# Allegro board wi-fi_2.brd
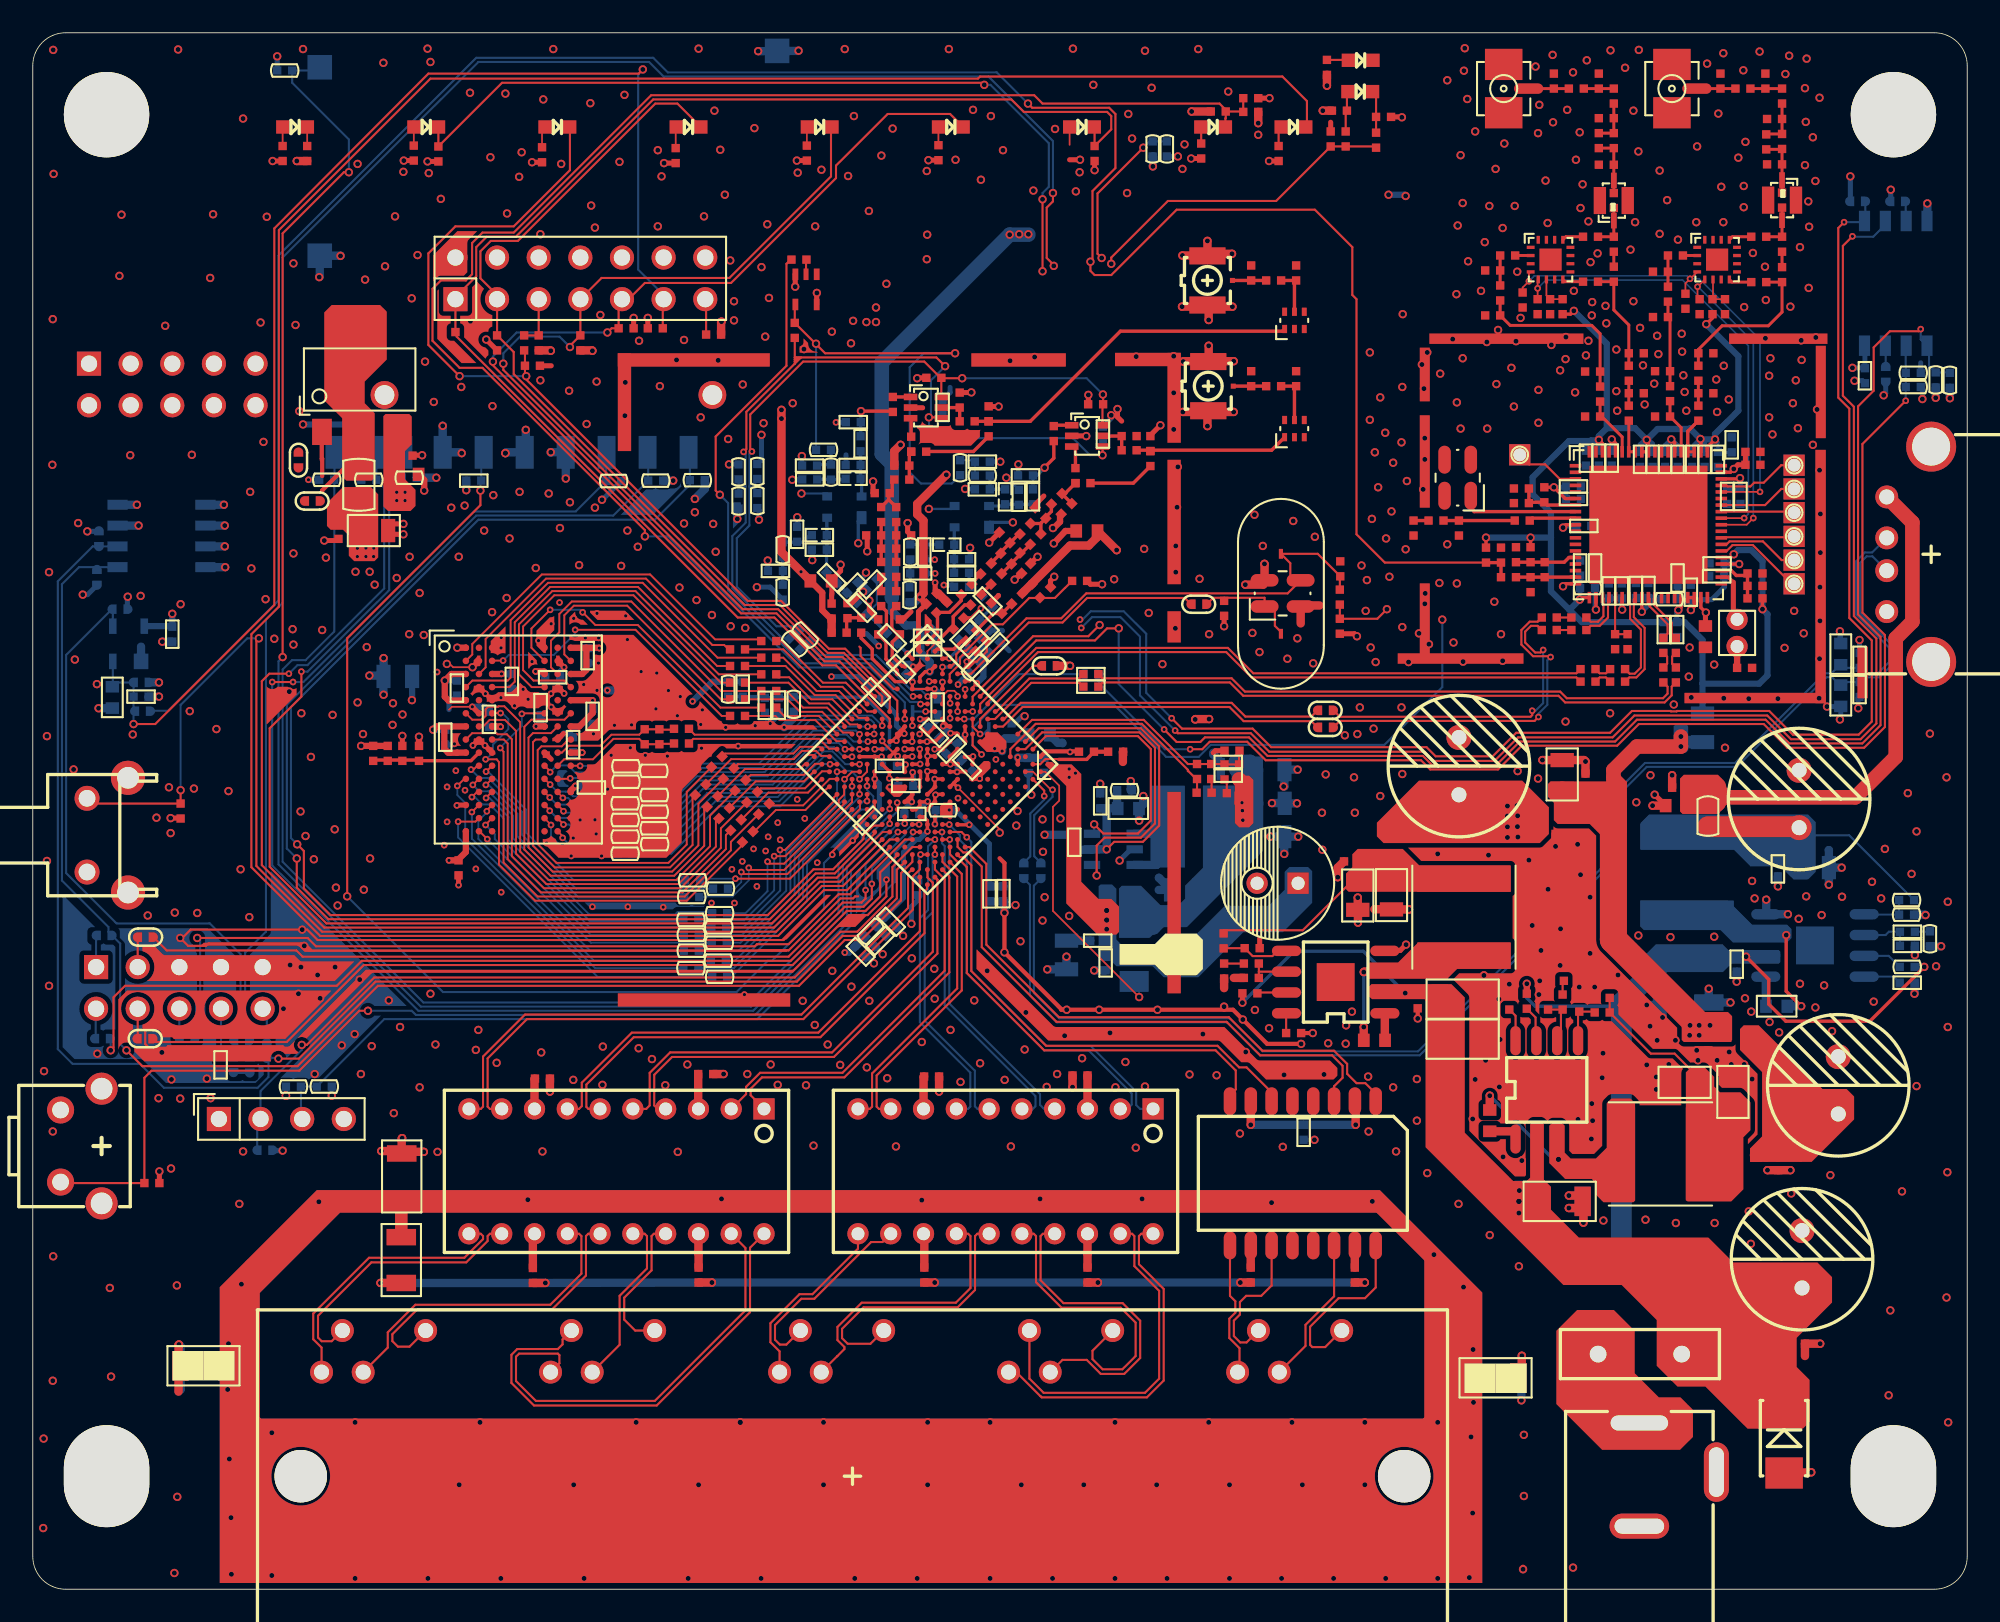
[diagram p0: board, top side]
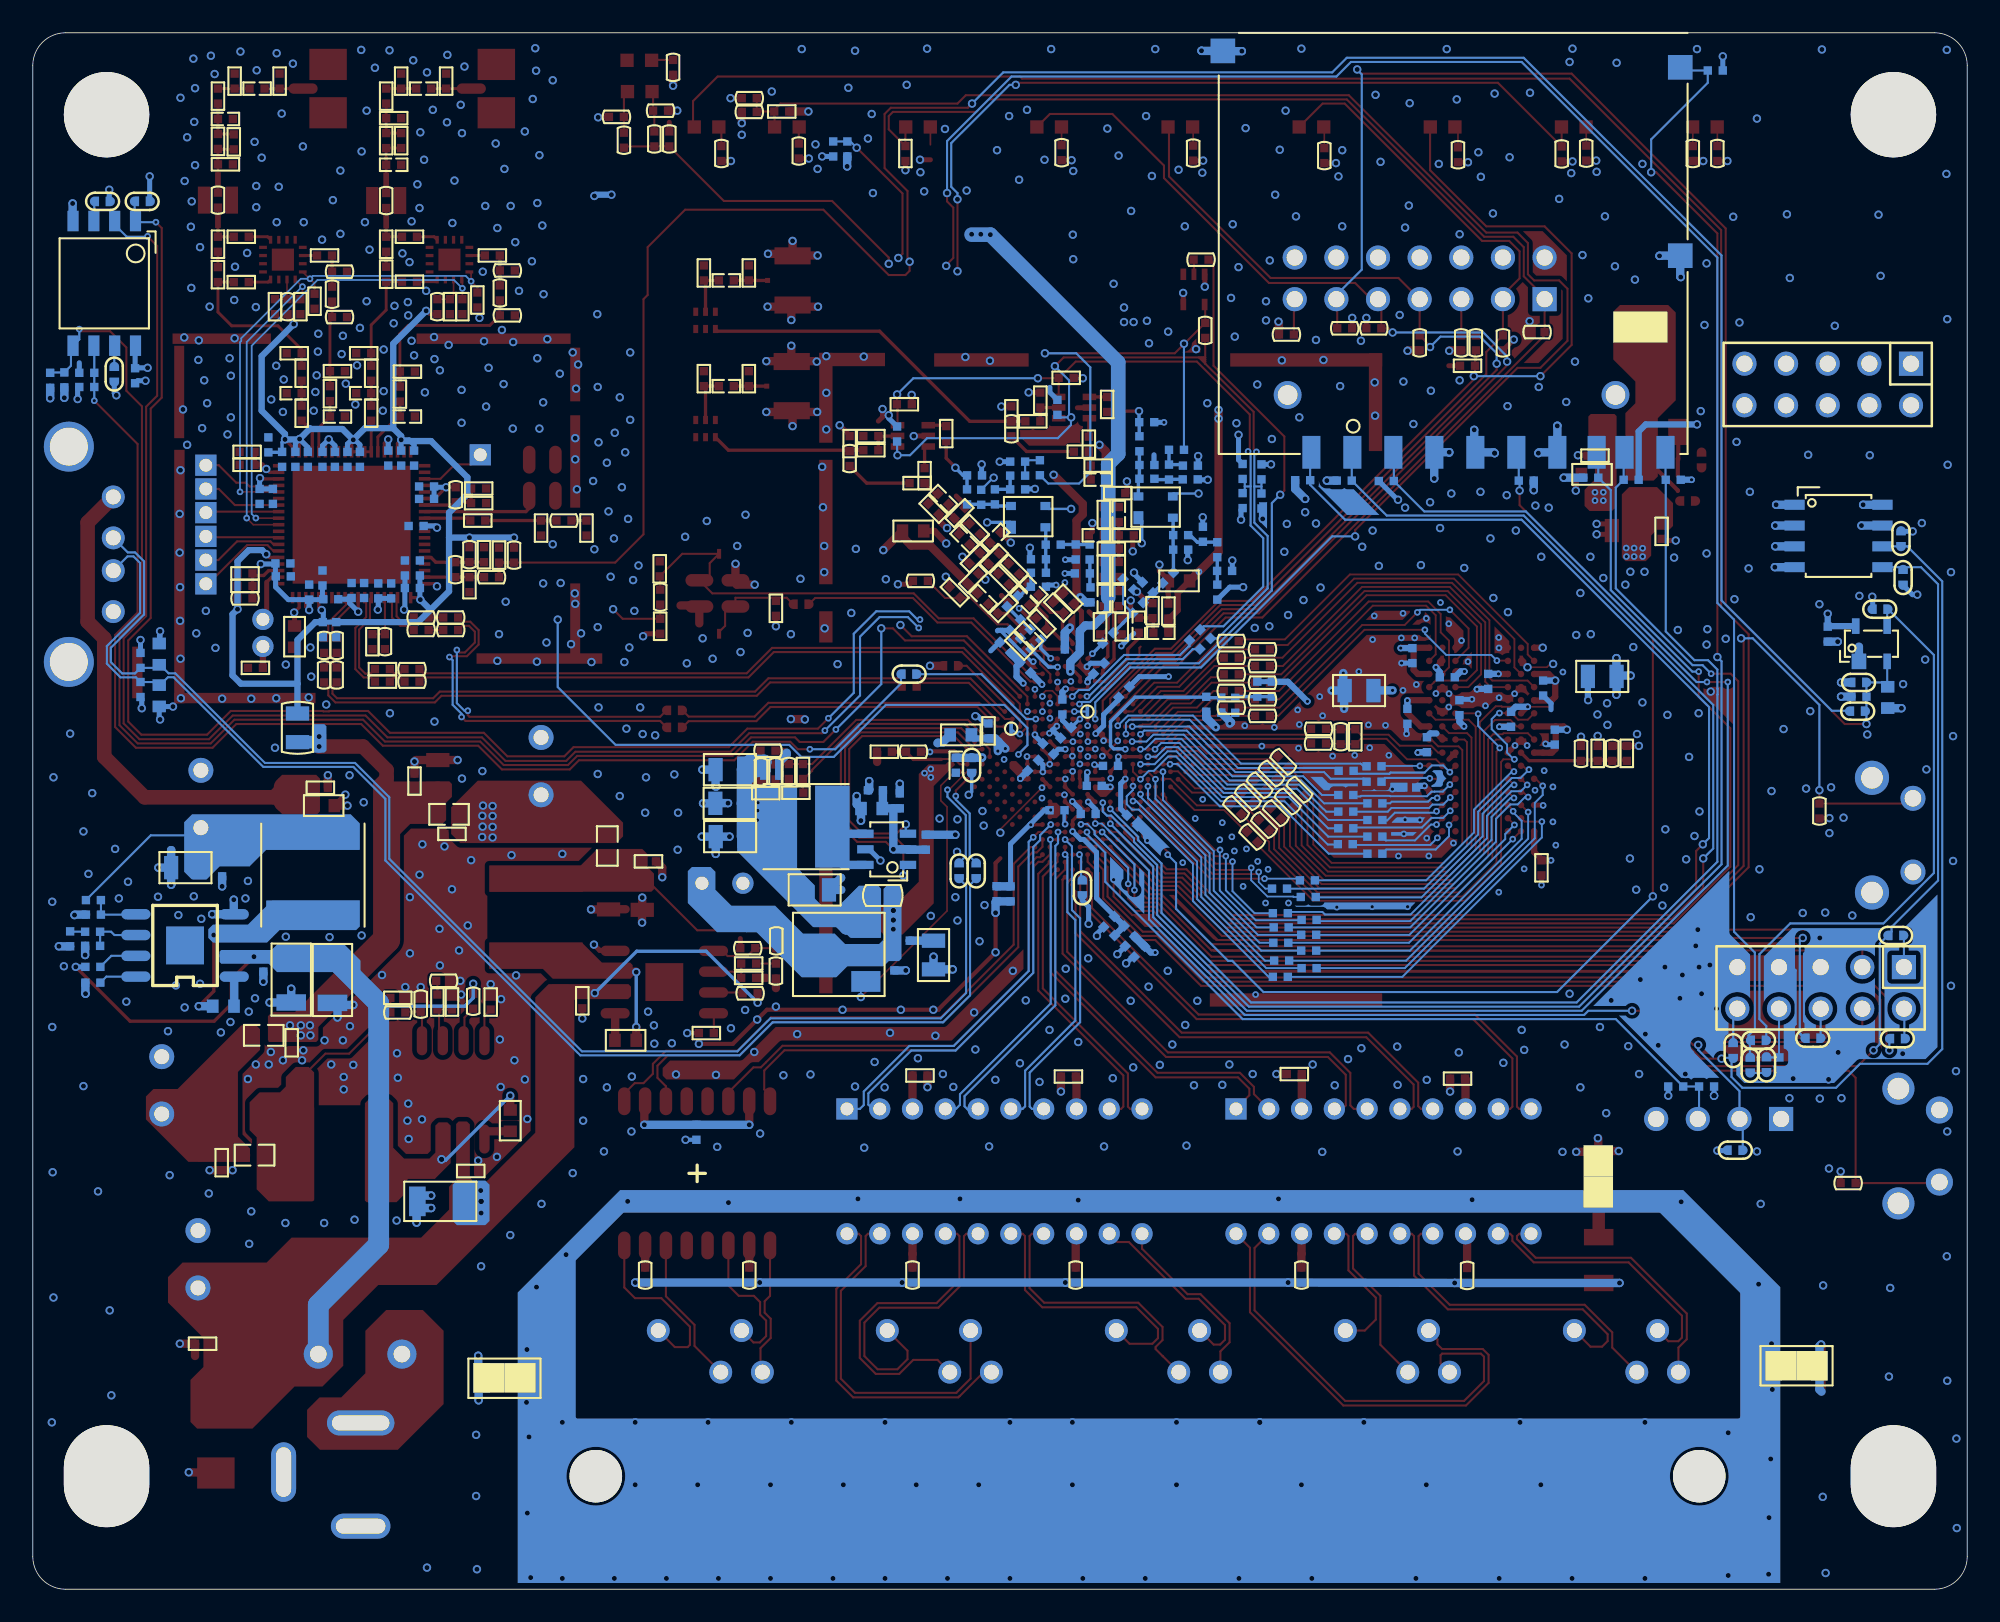
[diagram p1: board, bottom side, seen from below]

Outline 118 x 95 mm; copper layers: TOP, INNER LAYER 2, INNER LAYER 3, BOTTOM. Coordinates in mm from the lower left corner of the outline.
Outline path: 0,93 0,2 arc(0.59,0.59) 2,0 116,0 arc(117.41,0.59) 118,2 118,93 arc(117.41,94.41) 116,95 2,95 arc(0.59,94.41) 0,93

## Design rules (mm)
net group DDR_E: nets CLK_N_3013 CLK_P_3113 DDR_BA0_3813 DDR_BA1_3873 DDR_BA2_3693 DDR_CLK_N DDR_CLK_P DDR_MCKE_3473 DDR_MDQM0_3633 DDR_MDQM1_3733 DDR_MDQS0_3433 DDR_MDQS1_3533 DDR_WEN_3373 MA1 MA3 MA5 MA7 MA9 MA10 MA12 MADDR1_3213 MADDR3_3053 MADDR5_3713 MADDR7_3933 MADDR9_2893 MADDR10_3393 MADDR12_3573 MBA0 MBA1 MBA2 MCKE MD0 MD1 MD2 MD3 MD4 MD5 MD6 MD7 MD8 MD9 MD10 MD11 MD12 MD13 MD14 MD15 MDATA0_3073 MDATA1_3033 MDATA2_2933 MDATA3_3093 MDATA4_3953 MDATA5_3753 MDATA6_3893 MDATA7_3793 MDATA8_3553 MDATA9_3193 MDATA10_3333 MDATA11_3413 MDATA12_3613 MDATA13_3173 MDATA14_3253 MDATA15_2993 MDQM0 MDQM1 MDQS0 MDQS1 MWE_N
net group PCIE_E: nets APCK_RFCKON APCK_RFCKOP PCIE_TXN PCIE_TXP
net group PHY_ETH_E: nets RX0+ RX0- RX1+ RX1- RX2+ RX2- RX3+ RX3- RX4+ RX4- TX0+ TX0- TX1+ TX1- TX2+ TX2- TX3+ TX3- TX4+ TX4-
net group PHY_IC_E: nets RXIM0_16621532 RXIM1_16621532 RXIM2_16621532 RXIM3_16621532 RXIM4_16621532 RXIP0_16621532 RXIP1_16621532 RXIP2_16621532 RXIP3_16621532 RXIP4_16621532 TXOM0_16621532 TXOM1_16621532 TXOM2_16621532 TXOM3_16621532 TXOM4_16621532 TXOP0_16621532 TXOP1_16621532 TXOP2_16621532 TXOP3_16621532 TXOP4_16621532
net group RF_E: nets LNA_RX0_IN LNA_RX1_IN LNA_V0 LNAO0 LNAO1 N17231224 N17723672 N17723760 N17723789 N17732056 N17758787 N17758919 N17841324 N17841331 N17849608 N17851480 N17873514 N17877960 N17877962 N17884792 N17898362 N17906337 N21240349 O_N O_N_1 O_P O_P_1 PA0_OUT+ PA0_OUT- PA0_OUT_1 PA1_OUT+ PA1_OUT- PA1_OUT_1 RF0_2G_RX_1_747 RF0_LNA_IN RF0_PA_OUTN RF0_PA_OUTP RF1_2G_RX_1_747 RF1_LNA_IN RF1_PA2 RF1_PA_OUTN RF1_PA_OUTP RFOUT_G0_1117 RFOUT_G1_625
net group USB_E: nets UPHY0_PADM UPHY0_PADM_0 UPHY0_PADP UPHY0_PADP_0

## Placement (name value [footprint] x y rotation side)
C1  0R  [C0402]  99.87 72.97 270 top
C2  NC  [C0402]  99.42 74.35 180 top
C3  10pF/NI  [C0402]  95.02 82.55 0 top
C4  10pF/NI  [C0402]  95.02 79.81 180 top
C5  0R  [C0402]  95.61 72.95 270 top
C6  NC  [C0402]  95.15 74.32 180 top
C7  100uF/25V/NI  [C100UF25V_D6_3H11_5]  75.93 43.09 180 top
C8  10pF  [C0402]  89.97 81.41 0 top
C9  10pF  [C0402]  91.8 78.28 90 top
C10  10pF  [C0402]  90.88 78.69 90 top
C11  0.47uF/NI  [C0402]  93.98 67.31 0 bottom
C12  100pF  [C0402]  93.98 66.55 0 bottom
C13  10nF/NI  [C0402]  90.86 65.23 180 top
C14  4.7uF  [C0402]  105.05 62 0 top
C15  0.1uF  [C0402]  105.05 61.24 0 top
C16  10pF/NI  [C0402]  84.23 64.77 270 top
C17  NI  [C0402]  87 64.77 270 top
C18  1uF  [C0402]  90.81 67.18 180 top
C19  100pF  [C0402]  90.81 66.29 180 top
C20  1uF  [C0402]  95.53 69.04 270 bottom
C21  10pF/NI  [C0402]  94.74 69.04 270 bottom
C22  0.1uF/NI  [C0402]  90.47 63.14 90 top
C23  1uF  [C0402]  94.61 64.9 0 bottom
C24  10pF/NI  [C0402]  98.04 68.96 270 bottom
C25  1uF  [C0402]  103.35 66.7 270 bottom
C26  10pF  [C0402]  104.17 66.7 270 bottom
C27  10pF/NI  [C0402]  105.28 82.55 0 top
C28  10uF  [C0402]  104.42 56.24 0 top
C29  0.1uF/NI  [C0402]  65.11 48.12 90 bottom
C30  4.7uF  [C0603]  66.83 47.65 0 bottom
C31  4.7nF  [C0402]  73.29 48.59 180 top
C32  0.1uF/NI  [C0402]  72.92 49.66 180 bottom
C33  10uF  [C0805]  75.49 47.97 0 bottom
C34  10uF  [C0805]  75.46 45.94 0 bottom
C35  1uF  [C0402]  101.98 68.96 270 bottom
C36  0.1uF  [C0402]  58.67 57.48 45 bottom
C37  3.9nF  [C0402]  71.45 48.62 0 top
C38  100pF  [C0402]  71.02 49.91 90 top
C39  0.1uF  [C0402]  56.98 50.28 135 bottom
C40  0.1uF  [C0402]  56.06 51.3 224.5 bottom
C41  0.1uF  [C0402]  53.62 47.32 0 bottom
C42  4.7uF  [C0603]  61.39 52.15 0 bottom
C43  0.1uF/NI  [C0402]  53.25 49.03 0 bottom
C44  0.1uF  [C0402]  54.98 52.27 135 bottom
C45  10pF  [C0402]  100.81 78.61 90 top
C46  10uF/NI  [C0805]  75.48 50.03 0 bottom
C47  2.2uF  [C0603]  102.03 58.14 270 top
C48  4.7uF  [C0805]  63.06 38.71 270 bottom
C49  0.1uF  [C0402]  98.55 60.96 90 bottom
C50  0.1uF  [C0402]  65.44 38.23 270 bottom
C51  0.1uF  [C0402]  63.53 45.59 90 bottom
C52  0.1uF/NI  [C0402]  97.28 57.84 90 top
C53  0.1uF  [C0402]  96.67 56.16 0 top
C54  0.1uF  [C0402]  66.05 51.12 0 top
C55  0.1uF/NI  [C0402]  72.92 50.5 180 bottom
C56  10uF  [C0805]  70.31 42.68 180 bottom
C57  0.1uF  [C0402]  51.69 39.57 225 bottom
C58  1nF  [C0402]  52.35 40.74 315 bottom
C59  0.1uF  [C0402]  101.14 60.86 90 bottom
C60  0.1uF  [C0402]  100.33 61.72 90 bottom
C61  0.1uF  [C0402]  102.74 62.61 180 bottom
C69  0.1nF/NI  [C0402]  61.7 50.29 90 bottom
C70  0.1uF  [C0402]  45.5 53.96 270 bottom
C72  0.1uF  [C0402]  52.26 50.25 0 bottom
C73  4.7uF  [C0805]  22.26 55.71 180 bottom
C75  0.1uF  [C0402]  51.44 54.76 135 bottom
C76  0.1uF  [C0402]  50.93 46.91 225 bottom
C80  0.1uF  [C0402]  64.54 55.09 0 top
C81  0.1uF  [C0402]  64.54 55.85 0 top
C82  3.9pF  [C0402]  58.79 59.88 315 top
C83  100pF/NI  [C0402]  61.76 60.85 45 top
C84  10pF  [C0402]  58.15 62.29 45 top
C85  2.7nH  [C0402]  60.54 64.72 45 top
C86  0.8pF  [C0402]  59.37 62.9 135 top
C87  NI  [C0402]  61.47 65.68 135 top
C88  1.8pF/NI  [C0402]  63.06 65.94 225 top
C89  10pF  [C0402]  58.77 61.66 45 top
C90  2.7nH  [C0402]  60.54 62.93 315 top
C91  0.1uF  [C0402]  55.19 53.85 270 bottom
C92  3.9pF  [C0402]  60.64 61.68 315 top
C93  0.1uF  [C0402]  52.97 56.2 135 bottom
C94  10nF  [C0402]  57.43 57.71 45 bottom
C95  18pF  [C0402]  52.67 62.24 90 top
C96  2.2nH  [C0402]  52.67 65.6 90 top
C97  0.1uF  [C0402]  54.58 57.37 0 bottom
C99  NI  [C0402]  51.82 66.9 180 top
C100  1.8pF/NI  [C0402]  53.01 68.58 180 top
C101  0.8pF  [C0402]  52.21 63.51 0 top
C102  18pF  [C0402]  51.75 62.24 90 top
C103  0.1uF  [C0402]  54.58 58.19 0 bottom
C104  1uF  [C0402]  57.84 57.58 45 top
C105  2.7nH  [C0402]  51.3 64.33 180 top
C107  3.9pF  [C0402]  49.7 59.73 270 top
C108  33pF  [C0402]  72.67 59.87 270 top
C109  3.9pF  [C0402]  48.73 59.7 270 top
C110  0.1uF  [C0402]  54.83 60.46 45 top
C120  0 ohm/SB  [SB_1206]  22.5 25.2 270 top
C122  0 ohm/SB  [SB_1206]  89.23 12.88 180 bottom
C124  0.1uF  [C0402]  20.76 51.02 270 top
C125  0.1uF  [C0402]  22.54 51.02 90 top
C127  10pF/NI  [C0402]  37.33 52.03 270 top
C128  1uF/NI  [C0402]  31.71 55.66 0 bottom
C129  0.1uF/NI  [C0402]  25.16 52.01 270 bottom
C130  0.1uF  [C0402]  34.07 48.93 0 bottom
C131  0.1uF  [C0402]  27.83 53.1 90 bottom
C132  0.1uF/NI  [C0402]  25.97 44.03 270 top
C133  0.1uF/NI  [C0402]  30.98 53.81 90 bottom
C134  0.1uF  [C0402]  33.85 56.98 270 bottom
C135  0.1uF  [C0402]  34.15 53.28 270 bottom
C136  4.7uF  [C0805]  37.1 54.85 0 bottom
C137  0.1uF/NI  [C0402]  111.76 74.07 270 bottom
C138  0.1uF/NI  [C0402]  25.87 55 270 bottom
C139  0.1uF/NI  [C0402]  32.96 51.55 90 bottom
C140  0.1uF/NI  [C0402]  29.22 55.41 270 bottom
C166  0.1uF  [C0402]  59.21 42.46 270 bottom
C167  1nF  [C0402]  58.36 42.44 270 bottom
C199  1000pF/2KV  [C1206]  22.48 20.09 90 top
C210  0.1uF  [C0402]  59.7 52.39 90 bottom
C215  0.1uF  [C0402]  50.5 38.91 315 bottom
C275  NI  [C0402]  26.9 67.67 180 bottom
C456  4.7uF  [C0603]  64.3 64.59 180 top
C457  4.7uF  [C0603]  48.08 61.54 0 top
C820  0.1uF  [C0402]  43.31 54.94 270 bottom
C821  0.1uF  [C0402]  44.65 53.95 270 bottom
C841  2pF  [C0402]  55.45 59.92 45 top
C842  2pF  [C0402]  56.47 58.95 45.5 top
C843  2.2pF  [C0402]  52.9 58.74 90 top
C844  2.2pF  [C0402]  51.57 58.74 90 top
C845  10pF  [C0402]  30.48 74.68 0 top
C846  10pF  [C0402]  64.77 87.63 270 top
C847  NI  [C0402]  72.31 90.2 180 top
C917  1uF/NI  [C0402]  107.65 14.99 0 top
C918  330UF/25V  [CRE3_5PX8-12_5]  107.92 18.39 90 top
C925  10uF  [C0805]  93.29 49.73 90 top
C926  0.1uF/NI  [C0402]  94.72 49.33 90 top
C928  0.1uF  [C0402]  92.43 46.1 0 top
C929  0.1uF  [C0402]  106.48 26.04 270 top
C952  0.1uF  [C0402]  102.21 33.35 270 top
C963  0.1uF/NI  [C0402]  22.71 69.19 0 top
C964  4.7uF  [C0603]  22.89 68.05 0 top
C965  10uF/4V  [C0805]  20.8 64.62 0 top
C966  0.1uF  [C0402]  18.64 64.57 270 top
C967  4.7uF  [C0603]  100.25 47.83 180 top
C968  0.1uF/NI  [C0402]  100.46 48.92 180 top
C969  0.1uF/NI  [C0402]  8.51 58.29 270 bottom
C971  1.2pF  [C0402]  74.32 80.34 90 top
C972  1.2pF  [C0402]  77.06 80.34 90 top
C974  1.2pF  [C0402]  74.32 73.89 90 top
C975  1.2pF  [C0402]  77.06 73.89 90 top
C976  NI  [C0402]  11.46 32 270 bottom
C977  2.2pF/NI  [C0402]  46.62 64.39 270 bottom
C978  100nF/NI  [C0402]  45.3 62.15 0 bottom
C979  100nF/NI  [C0402]  47.4 67.74 0 bottom
C980  22pF/NI  [C0402]  48.74 61.73 135 bottom
C981  22pF/NI  [C0402]  50.58 59.89 135 bottom
C982  0.8pF/NI  [C0402]  47.98 63.45 0 bottom
C983  22pF/NI  [C0402]  52.41 58.05 135 bottom
C984  8.2pF/NI  [C0402]  50.5 69.91 270 bottom
C985  0.8pF/NI  [C0402]  50.04 68.62 180 bottom
C986  1.2pF/NI  [C0402]  49.99 61.14 45 bottom
C987  2.2pF/NI  [C0402]  51.17 61.33 225 bottom
C988  1.2pF/NI  [C0402]  47.38 68.58 180 bottom
C989  2.2pF/NI  [C0402]  50.05 71.23 180 bottom
C990  10pF/NI  [C0402]  54.97 73.94 180 top
C992  10pF/NI  [C0402]  55.5 72.14 90 bottom
C993  22pF/NI  [C0402]  58.24 60.3 135 bottom
C994  2.2pF/NI  [C0402]  58.06 58.85 315 bottom
C995  1.2pF/NI  [C0402]  56.65 61.19 180 bottom
C996  2.2pF/NI  [C0402]  60.55 67.98 180 bottom
C997  1.2pF/NI  [C0402]  57.92 68.82 0 bottom
C998  22pF/NI  [C0402]  56.83 58.27 45 bottom
C999  100nF/NI  [C0402]  57.92 67.13 0 bottom
C1000  0.8pF/NI  [C0402]  60.15 66.65 90 bottom
C1001  2.2pF/NI  [C0402]  54.38 63.31 90 bottom
C1002  8.2pF/NI  [C0402]  61.01 66.67 270 bottom
C1003  22pF/NI  [C0402]  56.65 62.04 180 bottom
C1004  100nF/NI  [C0402]  53.98 62 180 bottom
C1005  0.8pF/NI  [C0402]  56.65 62.87 180 bottom
C1006  10pF/NI  [C0402]  62.28 70.54 270 top
C1007  10pF/NI  [C0402]  64.83 72.33 180 top
C1008  10pF/NI  [C0402]  65.28 70.51 90 bottom
C1009  0.1uF  [C0402]  77.52 27.89 270 bottom
C1011  0.1uF  [C0402]  63.88 31.36 180 top
C1012  0.1uF  [C0402]  54.83 31.29 0 top
C1013  0.1uF  [C0402]  41.05 31.45 0 top
C1014  0.1uF  [C0402]  31.09 31.17 0 top
C1015  0.1uF/50V  [C0603]  106.38 35.59 0 bottom
C1016  10uF/25V  [C1206]  99.72 37.19 270 bottom
C1017  10uF/25V  [C1206]  102.23 37.21 270 bottom
C1018  0.01uF  [C0402]  103.94 38.15 90 bottom
C1019  0.1uF  [C0402]  114.34 37.02 180 bottom
C1020  22uF/10V  [C0805]  108.69 44.04 0 bottom
C1021  330UF/25V  [CRE3_5PX8-12_5]  107.75 46.48 90 top
C1022  0.1uF  [C0402]  106.45 43.97 270 bottom
C1023  10nF  [C0603]  81.84 33.5 180 top
C1024  3300pF  [C0402]  114.35 40.13 0 bottom
C1025  10uF/25V  [C1206]  87.22 33.58 0 top
C1026  10uF/25V  [C1206]  87.22 36.02 0 top
C1027  NI  [C0402]  114.35 39.27 180 bottom
C1028  0.01uF  [C0402]  84.48 35.92 90 top
C1029  10nF  [C0402]  76.91 33.95 180 top
C1030  22uF  [C0805]  80.82 42.34 270 top
C1031  22uF  [C0805]  82.88 42.37 270 top
C1032  0.1uF  [C0402]  80.44 44.42 180 top
C1033  330UF/25V  [CRE3_5PX8-12_5]  87 48.49 90 top
C1034  100K_1%  [C0402]  74.33 38.19 180 top
C1035  47pF  [C0402]  74.33 37.31 0 top
C1036  10nF  [C0603]  88.87 28.6 90 top
C1037  10uF/25V  [C1206]  93.14 23.67 0 bottom
C1038  10uF/25V  [C1206]  93.14 23.67 0 top
C1039  0.01uF  [C0402]  91.29 25.53 0 top
C1040  10nF  [C0402]  90.07 35.84 270 top
C1041  22uF  [C0805]  103.71 30.35 90 top
C1042  22uF  [C0805]  100.76 30.94 180 top
C1043  0.1uF  [C0402]  95.73 36.09 180 top
C1044  100K_1%  [C0402]  93.32 35.84 90 top
C1045  330UF/25V  [CRE3_5PX8-12_5]  110.13 29.01 90 top
C1046  47pF  [C0402]  92.43 35.84 270 top
C1047  10pF/NI  [C0402]  57 71.29 180 top
C1048  1.2pF/NI  [C0402]  56.54 72.58 90 top
C1049  2.2pF/NI  [C0402]  58.31 71.74 90 top
C1050  10pF/NI  [C0402]  66.88 69.52 180 top
C1051  1.2pF/NI  [C0402]  66.88 70.38 0 top
C1052  2.2pF/NI  [C0402]  68.17 69.93 90 top
C1053  10pF/NI  [C0402]  52.46 72.31 90 top
C1054  10pF/NI  [C0402]  53.58 69.89 270 top
C1055  10pF/NI  [C0402]  63.6 67.97 270 top
C1056  0 ohm/SB  [SB_1206]  10.41 13.64 0 top
C1057  0 ohm/SB  [SB_1206]  89.23 12.9 180 top
C1058  0 ohm/SB  [SB_1206]  10.41 13.64 0 bottom
C1059  10pF  [C0402]  54.04 69.43 0 top
C1060  10pF  [C0402]  64.06 67.51 0 top
C1061  NI  [C0402]  79.73 58.78 90 top
C1062  NI  [C0402]  79.76 62.28 270 top
C1063  0.47uF/NI  [C0402]  100.33 68.96 270 bottom
C1064  0.1uF  [C0402]  99.57 68.96 270 bottom
C1065  0.1uF  [C0402]  96.32 69.04 270 bottom
C1066  1uF  [C0402]  96.93 60.93 90 bottom
C1067  0.1uF  [C0402]  94.39 62.33 90 bottom
C1068  0.1uF  [C0402]  95.3 62.33 90 bottom
C1069  10pF  [C0402]  101.22 68.96 270 bottom
C1070  0.1uF  [C0402]  96.14 60.93 90 bottom
C1071  1uF  [C0402]  103.23 78.28 90 top
C1072  1uF  [C0402]  97.79 60.96 90 bottom
C1073  1uF  [C0402]  92.56 78.28 90 top
C1074  4.7nF  [C0402]  103.63 69.85 90 bottom
C1075  1uF  [C0402]  98.81 68.96 270 bottom
C1076  0.1uF  [C0402]  99.49 58.57 270 bottom
C1077  1uF  [C0402]  100.3 58.57 270 bottom
C1078  10pF  [C0402]  102.79 68.96 270 bottom
C1079  10pF  [C0402]  100.2 81.41 0 top
C1080  10pF/NI  [C0402]  105.28 79.78 180 top
C1081  10pF  [C0402]  101.68 78.28 90 top
C1082  1uF  [C0402]  104.93 69.42 0 top
C1083  10pF  [C0402]  104.93 68.63 0 top
C1084  0.1uF  [C0402]  96.67 55.4 0 top
C1085  0.1uF/NI  [C0402]  91.36 61.32 270 top
C1086  0.1uF/NI  [C0402]  89.56 63.12 90 top
C1087  2.2uF  [C0402]  102.72 61.82 180 bottom
CA1  10pF  [C0402]  96.44 91.14 90 top
CA2  2.2pF/NI  [C0402]  92.79 92.05 90 top
CA3  2.2pF/NI  [C0402]  95.53 92.05 90 top
CA4  10pF  [C0402]  106.71 91.14 90 top
CA5  2.2pF/NI  [C0402]  102.95 92.05 90 top
CA6  2.2pF/NI  [C0402]  105.69 92.05 90 top
CA7  0R/NI  [C0402]  95.53 88.42 270 top
CA8  1.0nH  [C0402]  96.44 88.42 270 top
CA9  0R  [C0402]  97.36 74.22 270 top
CA10  10pF  [C0402]  97.36 71.78 270 top
CA11  NI  [C0402]  105.74 88.34 90 top
CA12  0.3pF  [C0402]  95.99 89.79 180 top
CA13  0R  [C0402]  96.44 82.09 90 top
CA14  0R  [C0402]  96.44 80.26 90 top
CA15  0R  [C0402]  106.71 82.09 90 top
CA16  NI  [C0402]  97.82 75.44 0 top
CA17  10pF  [C0402]  101.6 71.78 90 top
CA18  1pF  [C0402]  101.6 74.22 270 top
CA19  1.0nH  [C0402]  106.71 88.37 90 top
CA20  NI  [C0402]  102.06 75.44 0 top
CA21  0.3pF  [C0402]  106.25 86.97 180 top
CA22  0R  [C0402]  106.71 80.24 90 top
CON1  SMA/UFLR/RF  [COAXIAL_SMD_CON_V_I-PEX]  89.72 91.59 90 top
CON2  SMA/UFLR/RF  [COAXIAL_SMD_CON_V_I-PEX]  99.99 91.59 90 top
CON3  SMA/UFLR  [ANTS3A-1_3]  71.65 79.88 270 top
CON4  SMA/UFLR  [ANTS3A-1_3]  71.7 73.43 270 top
D3  V-PORT/NI  [C0603]  110.29 57.07 270 bottom
D4  V-PORT/NI  [C0603]  110.29 54.53 90 bottom
D6  LED  [LEDS0603-0_6]  72 89.25 0 top
D7  LED  [LEDS0603-0_6]  16 89.25 0 top
D8  LED  [LEDS0603-0_6]  64 89.25 0 top
D9  LED  [LEDS0603-0_6]  56 89.25 0 top
D10  LED  [LEDS0603-0_6]  48 89.25 0 top
D11  LED  [LEDS0603-0_6]  40 89.25 0 top
D12  LED  [LEDS0603-0_6]  32 89.25 0 top
D13  LED  [LEDS0603-0_6]  76.9 89.25 0 top
D17  LED  [LEDS0603-0_6]  81 93.32 0 top
D20  LED  [LEDS0603-0_6]  80.98 91.41 0 top
D26  LED  [LEDS0603-0_6]  24 89.25 0 top
D47  1N4148/NI  [C0402]  6.6 54.48 0 bottom
F1  Fuse  [PS5_1PX9_7A-17_0]  100.58 14.35 180 top
H1  SMD  [DR52]  4.5 90 0 top
H2  SMD  [DR52]  113.5 90 0 top
H3  SMD  [DR52X62]  4.5 6.9 90 top
H4  SMD  [DR52X62]  113.5 6.9 90 top
J2  HEADER 4x1  [DIP4_P2_54]  11.35 28.7 0 top
J13  Header 7X2-2.54  [DIP7X2_P2_54]  25.78 78.74 0 top
J44  7SDCN-B0-1X14-SD Card Slot/NI/SLT  [CON10P_SMD_R_F_7SDCN-B0-1X14]  40.01 69.39 0 bottom
J45  DC JACK  [PJ3EA]  98 3.85 90 top
JP1  HEADER 5X2  [DIP5X2_P2_54]  3.43 74.8 0 bottom
JP2  HEADER 5X2  [DIP5X2_P2_54]  3.86 37.97 0 bottom
L1  NC  [L0402]  99.42 71.58 0 top
L2  NC  [L0402]  95.15 71.58 0 top
L3  VLS2520-2R2M  [L_IND_SMD_VLS252012E]  103.96 58.37 270 top
L4  4.7uH/VLC5045  [L_IND_SMD_LVS5045]  70.83 46.55 0 bottom
L5  3.9nH  [L0402]  57.24 58.2 225 top
L6  1.2pF  [L0402]  59.28 64.19 135 top
L7  10pF  [L0402]  62.46 66.55 45 top
L8  1.2pF  [L0402]  61.17 64.1 45 top
L9  1.2pF  [L0402]  53.12 64.33 0 top
L10  10pF  [L0402]  53.01 67.73 0 top
L11  1.2pF  [L0402]  51.75 65.6 90 top
L12  3.9nH  [L0402]  50.53 58.84 270 top
L13  3nH  [L0402]  49.19 58.38 0 top
L14  3nH  [L0402]  60.03 60.46 225 top
L623  2.7nH  [L0402]  56.96 61.03 45 top
L624  2.7nH  [L0402]  57.53 60.4 45 top
L625  2.7nH  [L0402]  52.67 60.46 90 top
L626  2.7nH  [L0402]  51.75 60.46 90 top
L636  2.4nH  [L0402]  75.69 79.88 0 top
L637  2.4nH  [L0402]  75.69 73.43 0 top
L638  3.9nH/NI  [L0402]  47.98 64.34 0 bottom
L639  5.1nH/NI  [L0402]  50.04 67.78 0 bottom
L640  5.1nH/NI  [L0402]  59.31 66.67 270 bottom
L641  3.9nH/NI  [L0402]  55.75 63.75 0 bottom
L642  15uH/LVS606045-150M-N  [L_IND_SMD_LVS606045-150M]  100.91 43.59 90 bottom
L643  4.7uH/VLC5045T-4R7M(TDK)  [L_IND_SMD_LVS606045-150M]  87.3 41.02 90 top
L644  UPB160808T-600Y-N(RoHS)  [L0603]  82.96 45.36 90 top
L645  0R/0603/NI  [L0603]  92.61 47.29 0 top
L646  4.7uH/VLC5045T-4R7M(TDK)  [L_IND_SMD_LVS606045-150M]  99.29 26.57 0 top
L647  0R/0603  [L0603]  104.47 26.49 0 top
L648  0R/0603  [L0603]  103.91 33.81 180 top
LA1  0pF  [L0402]  94.16 91.59 0 top
LA2  0pF  [L0402]  104.32 91.59 0 top
LA3  0.3pF  [L0402]  95.99 86.94 0 top
LA4  NI  [L0402]  97.82 73 180 top
LA5  2.7nH  [L0402]  102.06 73 180 top
LA6  0.3pF  [L0402]  106.25 89.74 0 top
P11  PJ-C5-DXBH-NNNNN-1(RoHS)  [10P4C2ANPX5A1-13_5]  50 6.9 180 top
Q1  BF776/NI  [SOT-343]  50.56 66.7 180 bottom
Q2  BF776/NI  [SOT-343]  58.33 66.12 180 bottom
R1  0 ohm  [R0402]  96.44 84.76 90 top
R2  0 ohm  [R0402]  106.71 84.79 270 top
R3  0R  [R0402]  93.32 78.28 90 top
R4  0R  [R0402]  89.51 79.12 270 top
R5  NC  [R0402]  89.05 80.49 0 top
R6  NC  [R0402]  89.05 77.75 0 top
R7  0 ohm  [R0805]  101.85 52.58 90 bottom
R9  10/NI  [R0402]  85.6 65.23 180 top
R11  1K/NI  [R0402]  91.36 63.14 90 top
R12  4.7K/NI  [R0402]  88.65 63.12 90 top
R13  0R  [R0402]  90.02 61.77 180 top
R14  0R  [R0402]  102.46 78.28 90 top
R15  0R  [R0402]  92.51 59.31 0 top
R16  0R  [R0402]  94.31 59.31 0 top
R18  0R  [R0402]  92.51 58.55 0 top
R19  0R  [R0402]  94.31 58.55 0 top
R20  0R  [R0402]  99.75 79.04 270 top
R21  2K 1%  [R0402]  73.58 49.89 90 top
R22  68 ohm 1%  [R0402]  72.69 49.89 90 top
R23  0 ohm/SB  [R0402]  57.45 56.26 45 bottom
R24  2K 1%  [R0402]  73.15 51.18 180 top
R26  4.7K 1%  [R0402]  71.88 49.91 90 top
R27  0 ohm/SB  [R0402]  66.6 48.77 180 bottom
R28  0 ohm/SB  [R0402]  64.27 51.12 0 top
R29  0 ohm/SB  [R0402]  51.1 40.16 45 bottom
R30  0R  [R0402]  100.23 55.8 90 top
R36  0 ohm/NI  [R0402]  79.73 60.55 90 top
R42  6.19K 1%  [0402]  53.98 42.8 0 bottom
R51  8.2K/ 1%  [0402]  60.73 50.29 180 bottom
R52  4.7K/NI  [0402]  3.91 61.75 0 bottom
R53  4.7K/NI  [0402]  4.04 64.13 180 bottom
R54  1K  [0402]  14.15 26.8 270 bottom
R56  0 ohm/SB  [R0402]  55.52 47.55 180 bottom
R64  0 ohm  [R0402]  42.44 49.79 45 top
R65  0 ohm  [R0402]  36.13 47.97 180 bottom
R66  0 ohm  [R0402]  42.17 47.36 45 top
R67  0 ohm  [R0402]  40.14 40.86 180 bottom
R68  0 ohm  [R0402]  40.74 48.8 45 top
R69  0 ohm  [R0402]  37.91 47.46 180 bottom
R70  0 ohm  [R0402]  42.89 46.64 45 top
R71  0 ohm  [R0402]  41.82 38.37 180 bottom
R72  0 ohm  [R0402]  43.88 48.35 45 top
R73  0 ohm  [R0402]  36.13 46.95 180 bottom
R74  0 ohm  [R0402]  41.72 50.5 45 top
R75  0 ohm  [R0402]  40.17 38.98 180 bottom
R76  0 ohm  [R0402]  43.16 49.07 45 top
R77  0 ohm  [R0402]  37.91 46.44 180 bottom
R78  0 ohm  [R0402]  41.45 48.08 45 top
R79  0 ohm  [R0402]  41.9 37.38 180 bottom
R80  0 ohm  [R0402]  44.89 54.83 0 top
R81  0 ohm  [R0402]  36.13 45.94 180 bottom
R82  0 ohm  [R0402]  42.99 57.37 0 top
R83  0 ohm  [R0402]  40.17 39.94 180 bottom
R84  0 ohm  [R0402]  44.89 55.84 0 top
R85  0 ohm  [R0402]  41.85 40.4 180 bottom
R86  0 ohm  [R0402]  42.99 56.35 0 top
R87  0 ohm  [R0402]  36.13 44.89 180 bottom
R88  0 ohm  [R0402]  44.89 56.86 0 top
R89  0 ohm  [R0402]  41.87 39.46 180 bottom
R90  0 ohm  [R0402]  42.99 55.33 0 top
R91  0 ohm  [R0402]  44.89 57.87 0 top
R92  0 ohm  [R0402]  42.99 54.32 0 top
R93  0 ohm  [R0402]  44.6 47.63 225 top
R94  0 ohm  [R0402]  44.89 53.81 180 top
R95  0 ohm  [R0402]  43.61 45.92 225 top
R96  0 ohm  [R0402]  42.99 53.3 180 top
R97  0 ohm  [R0402]  41.9 41.26 180 bottom
R98  0 ohm  [R0402]  40.2 42.25 180 bottom
R99  22 ohm  [R0402]  39.57 52.52 180 top
R100  22 ohm  [R0402]  39.57 51.62 180 top
R101  0 ohm  [R0402]  41.95 42.76 180 bottom
R103  0 ohm  [R0402]  37.88 49.95 180 bottom
R104  0 ohm  [R0402]  37.91 48.48 180 bottom
R105  0 ohm  [R0402]  40.25 43.27 180 bottom
R106  0 ohm  [R0402]  36.18 49.29 180 bottom
R107  24K 1%  [R0402]  63.86 61.54 0 top
R108  100  [0402]  71.12 60.12 90 top
R124  4.7K/NI  [R0402]  69.18 87.91 90 bottom
R125  4.7K/NI  [R0402]  114.71 73.38 180 bottom
R126  4.7K  [R0402]  68.31 87.91 90 bottom
R127  4.7K  [R0402]  114.71 74.24 180 bottom
R128  4.7K/NI  [R0402]  44.2 68.22 270 bottom
R129  4.7K/NI  [R0402]  43.05 68.2 270 bottom
R130  4.7K  [R0402]  44.2 66.45 90 bottom
R131  4.7K  [R0402]  43.05 66.42 90 bottom
R132  4.7K  [R0402]  74.3 91.01 180 top
R133  4.7K/NI  [R0402]  116.94 73.79 90 bottom
R134  4.7K/NI  [R0402]  74.3 90.17 180 top
R135  4.7K  [R0402]  116.08 73.81 90 bottom
R136  4.7K  [R0402]  24.74 87.6 90 top
R137  4.7K  [R0402]  15.9 30.68 0 bottom
R139  4.7K/NI  [R0402]  17.78 30.68 180 bottom
R142  4.7K  [R0402]  79.17 88.52 270 top
R150  120  [R0402]  38.22 52.03 270 top
R151  RES/0402_3  [0402]  113.03 74.17 180 bottom
R154  4.7K  [R0402]  9.02 47.5 90 top
R155  330  [R0402]  71.27 87.78 270 top
R156  330  [R0402]  78.94 92.89 270 top
R158  330  [R0402]  15.24 87.63 270 top
R159  0 ohm  [R0402]  16.74 87.63 90 top
R163  330  [R0402]  55.24 87.68 270 top
R165  330  [R0402]  47.22 87.66 270 top
R166  330  [R0402]  39.22 87.5 270 top
R167  330  [R0402]  31.06 87.55 270 top
R170  RES/0402_3  [0402]  111.33 84.71 90 bottom
R202  20R  [R0402]  92.2 66.8 90 top
R203  0R  [R0402]  105.05 60.48 0 top
R204  0R  [R0402]  99.82 60.43 0 bottom
R205  0R  [R0402]  94.84 61.11 180 bottom
R350  1K 1%  [R0402]  21.65 51.02 270 top
R351  1K 1%  [R0402]  23.56 51.02 90 top
R355  4.7K  [R0402]  7.26 24.79 180 top
R370  300 ohm/NI  [R0402]  79.71 90.25 180 top
R371  10K  [R0402]  40.54 67.69 180 bottom
R372  0 ohm/NI  [R0402]  76 87.63 270 top
R373  10K  [R0402]  38 67.67 180 bottom
R374  300 ohm  [R0402]  23.24 87.66 270 top
R375  10K  [R0402]  20.5 67.72 0 bottom
R376  10K  [R0402]  22.96 67.84 180 bottom
R377  10K  [R0402]  35.43 67.64 180 bottom
R381  12k ohm, 1%  [0402]  62 56.36 90 top
R382  22 ohm  [0402]  78.84 52.6 90 top
R383  22 ohm  [0402]  78.84 53.64 90 top
R388  10K  [R0402]  17.93 67.72 0 bottom
R389  10K  [R0402]  15.37 92.7 0 bottom
R471  10K  [R0402]  41.53 76.58 180 top
R472  1K/NI  [R0402]  37.97 76.96 0 top
R473  1K  [R0402]  36.2 76.96 180 top
R474  1K  [R0402]  33.4 76.07 90 top
R475  1K  [R0402]  30.86 76.07 90 top
R476  1K  [R0402]  28.32 76.07 90 top
R477  1K  [R0402]  26.24 76.73 180 top
R478  22  [R0402]  29.97 76.07 270 top
R479  0 ohm  [R0402]  36.18 50.23 180 bottom
R812  1K 1%  [R0402]  42.42 54.94 270 bottom
R813  1K 1%  [R0402]  46.42 54.01 270 bottom
R814  0 ohm  [0402]  60.45 43.84 0 bottom
R815  0 ohm  [0402]  61.49 43.84 0 bottom
R823  0 ohm/NI  [R0402]  81.94 88.44 90 top
R824  300 ohm  [R0402]  80.09 88.52 90 top
R825  0 ohm  [R0402]  82.4 89.87 0 top
R826  0 ohm  [R0402]  37.93 45.48 180 bottom
R827  0 ohm  [R0402]  40.14 37.91 180 bottom
R829  0 ohm  [C0402]  64.96 39.59 180 bottom
R830  0 ohm/NI  [R0603]  66.15 42.34 0 bottom
R894  RES/0402_3  [0402]  17.04 66.42 90 top
R895  0 ohm  [R0603]  102.18 47.19 90 top
R896  RES/0402_3  [0402]  5.33 59.82 90 bottom
R897  RES/0402_3  [0402]  6.63 55.35 90 bottom
R898  RES/0402_3  [0402]  16.21 68.91 180 top
R899  RES/0402_3  [0402]  6.68 53.59 270 bottom
R900  0 ohm  [R0805]  19.89 67.41 270 top
R902  OR  [0402]  9.42 33.63 90 bottom
R903  0R  [0402]  6.88 39.8 270 top
R904  0R  [0402]  6.86 33.6 270 top
R906  0R  [0402]  4.27 33.61 90 bottom
R907  0R  [0402]  12.73 33.5 270 bottom
R908  0R  [0402]  13.23 31.98 0 bottom
R909  0R  [0402]  14.28 32.87 0 bottom
R910  0R  [0402]  4.37 39.9 90 bottom
R911  22R  [0402]  12.24 32.01 0 bottom
R912  36 ohm/NI  [R0402]  45.75 60.86 270 bottom
R913  12 ohm/NI  [R0402]  45.75 63.45 270 bottom
R914  30K/NI  [R0402]  48.69 68.19 270 bottom
R918  0 ohm/NI  [R0402]  48.23 69.55 180 bottom
R919  10pF  [R0402]  58.31 70.83 90 top
R921  10pF  [R0402]  68.17 69.01 90 top
R922  30K/NI  [R0402]  57.92 67.97 0 bottom
R923  36 ohm/NI  [R0402]  53.48 60.69 270 bottom
R924  12 ohm/NI  [R0402]  53.53 63.31 270 bottom
R928  0 ohm/NI  [R0402]  56.57 68.45 270 bottom
R932  0 ohm/NI  [R0402]  46.74 81.15 0 top
R934  75R,1%  [R0402]  80.64 19.18 270 top
R935  75R,1%  [R0402]  74.3 19.18 270 top
R936  75R,1%  [R0402]  64.34 19.18 270 top
R937  75R,1%  [R0402]  54.38 19.18 270 top
R938  75R,1%  [R0402]  40.61 19.18 270 top
R939  75R,1%  [R0402]  30.51 19.15 270 top
R940  100K  [R0402]  114.34 37.99 180 bottom
R941  63.4K  [R0402]  114.3 42.06 180 bottom
R942  100K  [R0402]  74.24 36.37 0 top
R943  20K  [R0402]  115.72 39.7 270 bottom
R944  31.6K_1%  [R0402]  72.64 39.57 270 top
R945  11.8K_1%  [R0402]  114.3 41.17 0 bottom
R946  2.2nF  [R0402]  72.67 37.73 270 top
R947  10K_1%  [R0402]  74.38 39.13 0 top
R948  100K  [R0402]  91.14 35.89 270 top
R949  31.6K_1%  [R0402]  95.73 35.2 180 top
R950  2.2nF  [R0402]  92.94 37.13 180 top
R951  10K_1%  [R0402]  94.34 35.71 90 top
R952  0 ohm  [R0402]  47.12 58.24 135 bottom
R953  0 ohm  [R0402]  46.48 57.71 135 bottom
R954  0 ohm/NI  [R0402]  46.48 76.83 90 top
R955  0R  [R0402]  94.87 55.4 0 top
R956  0R  [R0402]  99.47 57.61 90 top
R957  0R  [R0402]  99.47 55.8 90 top
R958  0R  [R0402]  100.23 57.61 90 top
R959  5.1K / 1%  [R0402]  96.52 57.84 90 top
R960  NC  [R0402]  99.29 77.65 0 top
R961  NC  [R0402]  99.29 80.42 0 top
R962  0R  [R0402]  94.87 56.16 0 top
RA1  0R  [R0402]  92.23 62.23 270 top
RC1  4.7uF  [C0603]  4.85 54.43 270 bottom
S2  SW TACT-SPST-RA  [SWT2RA]  5.81 46.02 270 top
S3  SW TACT-SPST-RA  [SWA4F315A3-7_4]  4.2 27.05 0 top
SR1  22R  [0402]  64.54 55.85 270 bottom
SR2  RES/0402_3  [0402]  113.74 84.71 270 bottom
T2  20PT1024SXLF(RoHS)  [T20A2N0-6_8]  68.34 29.32 180 top
T3  20PT1024SXLF(RoHS)  [T20A2N0-6_8]  44.6 29.32 180 top
T4  TS21CHF(RoHS)(HF)  [TS16A127N0-5_7]  77.47 25.38 270 top
TP1  SMD  [PAD_1P_0_5MM]  53.66 53.56 180 bottom
TP2  SMD  [PAD_1P_0_5MM]  58.31 52.52 180 bottom
TP246  T POINT F  [TP30MIL]  107.44 68.61 0 top
TP247  T POINT F  [TP30MIL]  90.7 69.24 0 top
TP249  T POINT F  [TP30MIL]  107.44 61.37 0 top
TP250  T POINT F  [TP30MIL]  107.44 62.81 0 top
TP251  T POINT F  [TP30MIL]  107.44 64.26 0 top
TP254  T POINT F  [TP30MIL]  107.44 65.71 0 top
TP255  T POINT F  [TP30MIL]  107.44 67.16 0 top
TVS1  LT_SMAJ58A  [DS2-2_6]  106.83 9.22 90 top
U1  MT7620A  [TFBGA265_P0_65_B0_3_11X11]  54.57 50.36 315 top
U2  SPDT / SKYWORKS / SKY85601-11  [SKY85601]  92.58 81.15 270 top
U3  LFB215G42SG8A300/NI  [BPF20125_MURATA-KIM]  106.71 84.79 270 top
U4  MT7612E  [WSQFN76_SMD_P0_4_9X9_S]  98.55 64.97 270 top
U5  40MHz XTAL  [CRYS_SMD_D3_2X2_5]  86.92 67.84 90 top
U6  APM2701AC  [SOT-23-6_SMD_P0_95_APM2701AC]  65.91 45.16 90 bottom
U8  BTA1664M3  [SOT89_SMD]  67.18 38.75 90 bottom
U9  AT24C04A/SB/NI  [SOIC8_SMD_P1_27_AT24C04B-08B]  7.85 64.29 270 bottom
U11  XTAL/NI  [CRYS_SMD_D3_2X2_5]  76.24 60.78 0 top
U18  MX25L6406EM2I-12G  [SOIC8_SMD_P1_27_AT26DF321]  113.64 79.71 0 bottom
U22  DDR2  [WBGA84_SMD_P0_8_W9751G6IB]  29.62 51.86 270 top
U33  20MHz  [CRYS_DIP_D5X10_6]  76.14 60.76 90 top
U626  APL1117VC  [SOT223-3_SMD_P2_3_AX1007]  19.94 73.84 0 top
U627  G693L_R3132Q/NI  [SOT-143_SMD_G693]  5.84 57.71 180 bottom
U628  DPX165900DT-8125A1  [BL1608]  76.96 77.44 180 top
U629  DPX165900DT-8125A1  [BL1608]  76.96 70.84 180 top
U630  UPG2179TB-E4-A/NI  [TSON6_SMD_P0_65_UPG2179TB]  54.48 72.12 270 top
U631  UPG2179TB-E4-A/NI  [TSON6_SMD_P0_65_UPG2179TB]  64.31 70.4 270 top
U632  74LVC1G04_SC70/NI  [SOT-353]  47.17 79.34 180 top
U634  RT8292AHZSP(RoHS)(HF)  [SOP8AG1-1_8]  108.71 39.29 90 bottom
U635  IT7673M-SOP8  [SOP8AG1-1_8]  79.48 37.06 90 top
U636  IT7673M-SOP8  [SOP8AG1-1_8]  92.35 30.48 0 top
U637  SPDT / SKYWORKS / SKY85601-11  [SKY85601]  102.74 81.15 270 top
U638  LFB215G42SG8A300/NI  [BPF20125_MURATA-KIM]  96.44 84.76 90 top
UC1  5pF/NI  [C0402]  111.43 56.69 90 bottom
UC2  5pF/NI  [C0402]  111.43 54.91 270 bottom
USB1  C-UBR27-00-00  [J-USB4A2R-7_5]  115.8 63.17 90 top

## Library data of the parts
C1-C6 C8-C28 C31 C32 C35 C37 C38 C45 C47 C49 C52 C53 C59-C61 C124 C125 C127-C135 C138-C140 C199 C820 C821 C841-C847 C917 C926 C928 C929 C952 C967 C968 C971 C972 C974 C975 C980 C981 C983 C986-C990 C992-C998 C1003 C1007-C1009 C1011-C1020 C1022-C1032 C1034-C1044 C1046-C1052 C1059 C1060 C1063-C1087 CA1-CA22 = CAP/0402
C7 C918 C1021 C1033 C1045 = CAP_1
C29 C36 C39-C41 C43 C44 C50 C51 C54 C55 C70 C72 C75 C76 C83 C91 C94 C97 C103 C104 C108 C210 C963 C966 C1061 C1062 = CAP/0402_0
C30 C33 C34 C46 C456 C457 RC1 = CAP/0603
C42 C48 C56 C73 C964 C965 = CAP/1210_1206
C57 C58 C69 C80-C82 C84-C90 C92 C93 C95 C96 C99-C102 C105 C107 C109 C110 C137 C166 C167 C215 C969 UC1 UC2 = CAP/0402_1
C120 C122 C1056-C1058 = CAP/1206
C136 C925 = CAP/0805
C275 C976 = C0402
C977-C979 C982 C984 C985 C999-C1002 C1004-C1006 C1053-C1055 = CAP/0402_5
CON1-CON4 = SMA/UFLR
D3 D4 = DIODE DIAC
D6-D13 D17 D20 D26 = LED/0603
D47 = DIODE SK34A
F1 = DC JACK_4
H1-H4 TP1 TP2 = TP-SMD
J2 = HEADER 4x1_0
J13 = HEADER 7x2-male
J44 = 7SDCN-B0-1X14-SD Card Slot
J45 = DC JACK_0
JP1 JP2 = HEADER 5X2
L1 L2 LA3-LA6 = INDUCTOR
L3 = L/2.5*2.0
L4 = L/GDR1012
L5-L14 L623-L626 L636-L641 LA1 LA2 = L/0402
L642-L648 = L
P11 = PJ-C5-DXBH
Q1 Q2 = LNA BF776
R1 R2 = RESISTOR
R3-R6 R9 R11-R16 R18-R24 R26-R28 R30 R202-R205 R829 R830 R955-R962 RA1 = RES/0402_1
R7 = RES/1206_0805
R29 R56 R155 R156 R158 R159 R163 R165-R167 = RES/0402_5
R36 R107 R932 R952-R954 = RES/0402_2
R42 R51-R54 R108 R151 R170 R370 R372 R374 R381-R383 R814 R815 R823-R825 R894 R896-R899 R902-R904 R906-R911 SR1 SR2 = RES/0402_3
R64-R101 R103-R106 R124-R137 R139 R142 R150 R350 R351 R355 R471-R479 R812 R813 R826 R827 = RES/0402
R154 = RES/0402_6
R371 R373 R375-R377 R388 R389 R895 R900 R934-R951 = R0402
R912-R914 R918 R919 R921-R924 R928 = RES/0402_7
S2 S3 = SW TACT-SPST-RA
T2 T3 = 20PT1024SXLF_1
T4 = TS21CHF
TP246 TP247 TP249-TP251 TP254 TP255 = T POINT F
TVS1 = DIODE SCHOTTKY
U1 = MT7620A
U2 U637 = SPDT / SKYWORKS / SKY85601-21
U3 U638 = BPF-BF2012-L5R5DAB_0
U4 = MT7662E-20121128_0
U5 = XTAL_1.5
U6 = APM2701AC
U8 = BJT 2SB1386-PNP_3
U9 = Mem AT24C02_0
U11 = XTAL_3.2x2.5
U18 = SPIFlash-Winbond25P16_0
U22 = MT47H16M16BG_1
U33 = XTAL_20MHZ_1
U626 = LDO RT9164A-SOT223_5
U627 = IC DET SOT-143/SC-82AB_0
U628 U629 = DPLX-DP2012-E2455BA-ACX_0
U630 U631 = HWS314_2
U632 = 74LVC1G04_SC70
U634-U636 = RT8293B
USB1 = USB_A-RECEPT-DIP_1

## Footprints (pads in the part's own frame, mm; a bottom-side part is the same pattern mirrored in y, then rotated)
10P4C2ANPX5A1-13_5
  round 3.2 hole 3.2 unplated: (-33.655,0) (33.655,0)
  round 1.397 hole 0.914: 1(32.385,-6.35) 2(31.115,-8.89) 3(29.845,-6.35) 6(26.035,-8.89) 11(18.415,-6.35) 12(17.145,-8.89) 13(15.875,-6.35) 16(12.065,-8.89) 21(4.445,-6.35) 22(3.175,-8.89) 23(1.905,-6.35) 26(-1.905,-8.89) 31(-9.525,-6.35) 32(-10.795,-8.89) 33(-12.065,-6.35) 36(-15.875,-8.89) 41(-23.495,-6.35) 42(-24.765,-8.89) 43(-26.035,-6.35) 46(-29.845,-8.89)
  round 0 smd: 4(28.575,-8.89) 5(27.305,-6.35) 7(24.765,-6.35) 8(23.495,-8.89) 9(22.225,-6.35) 10(33.655,-8.89) 14(14.605,-8.89) 15(13.335,-6.35) 17(10.795,-6.35) 18(9.525,-8.89) 19(8.255,-6.35) 20(19.685,-8.89) 24(0.635,-8.89) 25(-0.635,-6.35) 27(-3.175,-6.35) 28(-4.445,-8.89) 29(-5.715,-6.35) 30(5.715,-8.89) 34(-13.335,-8.89) 35(-14.605,-6.35) 37(-17.145,-6.35) 38(-18.415,-8.89) 39(-19.685,-6.35) 40(-8.255,-8.89) 44(-27.305,-8.89) 45(-28.575,-6.35) 47(-31.115,-6.35) 48(-32.385,-8.89) 49(-33.655,-6.35) 50(-22.225,-8.89)
0402
  custom 0.584x0.559 smd: 1(0,0.47) 2(0,-0.495)
ANTS3A-1_3
  rect 0.305x0.305 smd: 1(0,1.525)
  rect 1.041x2.21 smd: 2(-1.5,0) 3(1.5,0)
BL1608
  rect 0.3x0.5 smd: 1(0.6,0.525) 2(0,0.525) 3(-0.6,0.525) 4(-0.6,-0.525) 5(0,-0.525) 6(0.6,-0.525)
BPF20125_MURATA-KIM
  rect 1.65x0.75 smd: 1(0,0.85) 3(0,-0.85)
  rect 0.95x0.35 smd: 2(1.225,0) 4(-1.225,0)
C100UF25V_D6_3H11_5
  rect 1.3x1.3 hole 0.8: 1(-1.25,0)
  round 1.3 hole 0.8: 2(1.25,0)
C0402
  rect 0.508x0.508 smd: 1(-0.457,0) 2(0.457,0)
C0603
  rect 0.711x0.813 smd: 1(-0.65,0) 2(0.65,0)
C0805
  rect 0.864x1.422 smd: 1(-0.875,0) 2(0.875,0)
C1206
  rect 1x1.8 smd: 1(-1.4,0) 2(1.4,0)
COAXIAL_SMD_CON_V_I-PEX
  oval 0.635x1.778 smd: 1(0,-1.525)
  rect 1.905x2.286 smd: 2(-1.475,0) 3(1.475,0)
CON10P_SMD_R_F_7SDCN-B0-1X14
  round 1.7 hole 1.2 unplated: (-18.55,-3.5) (1.45,-3.5)
  rect 1.1x2 smd: 1(-2.5,0) 2(-5,0) 3(-7.5,0) 4(-10,0) 5(-12.5,0) 6(-15,0) 7(-17.4,0) 8(-19.1,0) 9(0,0) CD(-21.6,0)
  rect 1.5x1.5 smd: GND1(-22.5,-12) GND2(5.4,-24.5) WP(-22.5,-23.5)
CRE3_5PX8-12_5
  round 1.524 hole 0.914: 1(0,0) 2(3.5,0)
CRYS_DIP_D5X10_6
  rect 0.6x0.25 smd: 1(-2.44,0) 2(2.44,0)
CRYS_SMD_D3_2X2_5
  oval 1.702x0.762 smd: 1(-1.1,-0.8) 2(1.1,-0.8) 3(1.1,0.8) 4(-1.1,0.8)
DIP4_P2_54
  rect 1.473x1.473 hole 0.991: 1(0,0)
  round 1.473 hole 0.991: 2(2.54,0) 3(5.08,0) 4(7.62,0)
DIP5X2_P2_54
  rect 1.473x1.473 hole 0.991: 1(0,0)
  round 1.473 hole 0.991: 2(0,2.54) 3(2.54,0) 4(2.54,2.54) 5(5.08,0) 6(5.08,2.54) 7(7.62,0) 8(7.62,2.54) 9(10.16,0) 10(10.16,2.54)
DIP7X2_P2_54
  rect 1.473x1.473 hole 0.991: 1(0,0)
  round 1.473 hole 0.991: 2(0,2.54) 3(2.54,0) 4(2.54,2.54) 5(5.08,0) 6(5.08,2.54) 7(7.62,0) 8(7.62,2.54) 9(10.16,0) 10(10.16,2.54) 11(12.7,0) 12(12.7,2.54) 13(15.24,0) 14(15.24,2.54)
DR52
  round 5.207 hole 5.207 unplated: (0,0)
DR52X62
  oval 6.223x5.207 hole 6.223x5.207 unplated: (0,0)
DS2-2_6
  rect 1.905x2.286 smd: 1(-2.125,0) 2(2.125,0)
J-USB4A2R-7_5
  round 1.397 hole 0.914: 1(3.5,2.71) 2(1,2.71) 3(-1,2.71) 4(-3.5,2.71)
  round 3.048 hole 2.311: 5(-6.57,0) 6(6.57,0)
L0402
  rect 0.508x0.508 smd: 1(-0.457,0) 2(0.457,0)
L0603
  rect 0.711x0.813 smd: 1(-0.65,0) 2(0.65,0)
L_IND_SMD_LVS5045
  rect 2.1x5 smd: 1(-1.6,0) 2(1.6,0)
L_IND_SMD_LVS606045-150M
  rect 1.6x5.7 smd: 1(-2.35,0) 2(2.35,0)
L_IND_SMD_VLS252012E
  round 1.295 hole 0.787: 1(-0.825,0) 2(0.825,0)
LEDS0603-0_6
  rect 0.813x0.813 smd: 1(-0.75,0) 2(0.75,0)
PAD_1P_0_5MM
  rect 0.22x0.8 smd: 1(-0.01,0.007)
PJ3EA
  oval 1.524x4.115 hole 0.914x3.505: 1(6.3,0)
  oval 1.524x3.632 hole 0.914x3.023: 2(0,0)
  oval 3.632x1.524 hole 3.023x0.914: 3(3.3,-4.7)
PS5_1PX9_7A-17_0
  round 1.778 hole 1.016: 1(0,0) 2(5.1,0)
R0402
  rect 0.508x0.508 smd: 1(-0.457,0) 2(0.457,0)
R0603
  rect 0.711x0.813 smd: 1(-0.65,0) 2(0.65,0)
R0805
  rect 0.864x1.422 smd: 1(-0.875,0) 2(0.875,0)
SB_1206
  rect 1x1.8 smd: 1(-1.4,0) 2(1.4,0)
SKY85601
  rect 0.2x0.475 smd: 1(-0.75,-1.213) 2(-0.25,-1.213) 3(0.25,-1.213) 4(0.75,-1.213) 9(0.75,1.213) 10(0.25,1.213) 11(-0.25,1.213) 12(-0.75,1.213)
  rect 0.475x0.2 smd: 5(1.213,-0.75) 6(1.213,-0.25) 7(1.213,0.25) 8(1.213,0.75) 13(-1.213,0.75) 14(-1.213,0.25) 15(-1.213,-0.25) 16(-1.213,-0.75)
  rect 1.35x1.35 smd: 17(0,0)
SOIC8_SMD_P1_27_AT24C04B-08B
  rect 0.61x1.235 smd: 1(-1.905,-2.68) 2(-0.635,-2.68) 3(0.635,-2.68) 4(1.905,-2.68) 5(1.905,2.68) 6(0.635,2.68) 7(-0.635,2.68) 8(-1.905,2.68)
SOIC8_SMD_P1_27_AT26DF321
  rect 0.68x1.25 smd: 1(-1.905,-3.805) 2(-0.635,-3.805) 3(0.635,-3.805) 4(1.905,-3.805) 5(1.905,3.805) 6(0.635,3.805) 7(-0.635,3.805) 8(-1.905,3.805)
SOP8AG1-1_8
  oval 0.635x1.778 smd: 1(-1.905,-3) 2(-0.635,-3) 3(0.635,-3) 4(1.905,-3) 5(1.905,3) 6(0.635,3) 7(-0.635,3) 8(-1.905,3)
  rect 2.311x2.311 smd: 9(0,0)
SOT89_SMD
  rect 1.27x1.778 smd: 1(-1.651,0) 2(0,0) 3(1.651,0)
SOT223-3_SMD_P2_3_AX1007
  rect 1.2x1.6 smd: 1(-2.3,-3.2) 2(0,-3.2) 3(2.3,-3.2)
SOT-23-6_SMD_P0_95_APM2701AC
  rect 0.5x1 smd: 1(-0.95,-1.3) 2(0,-1.3) 3(0.95,-1.3) 4(0.95,1.3) 5(0,1.3) 6(-0.95,1.3)
SOT-143_SMD_G693
  rect 0.89x0.95 smd: 1(-0.76,-1.075)
  rect 0.46x0.95 smd: 2(0.96,-1.075) 3(0.96,1.075) 4(-0.96,1.075)
SOT-343
  rect 0.6x0.5 smd: 1(0,0) 3(2.101,-1.3) 4(2.101,0)
  rect 0.6x0.8 smd: 2(0,-1.3)
SOT-353
  rect 0.35x0.7 smd: 1(-0.65,-0.922) 3(0.65,-0.922) 4(0.65,0.922) 5(-0.65,0.922)
  rect 0.3x0.7 smd: 2(0,-0.922)
SWA4F315A3-7_4
  round 1.651 hole 1.016: 1(-2.5,2.2) 2(-2.5,-2.2)
  round 1.956 hole 1.321: 3(0,3.5) 4(0,-3.5)
SWT2RA
  round 1.524 hole 1.016: 1(-2.25,-2.5) 2(2.25,-2.5)
  round 2.083 hole 1.321: 3(-3.5,0) 4(3.5,0)
T20A2N0-6_8
  rect 1.295x1.295 hole 0.787: 1(0,0)
  round 1.295 hole 0.787: 2(2,0) 3(4,0) 4(6,0) 5(8,0) 6(10,0) 7(12,0) 8(14,0) 9(16,0) 10(18,0) 11(18,7.62) 12(16,7.62) 13(14,7.62) 14(12,7.62) 15(10,7.62) 16(8,7.62) 17(6,7.62) 18(4,7.62) 19(2,7.62) 20(0,7.62)
TFBGA265_P0_65_B0_3_11X11
  round 0.3 smd: A1(-5.2,5.2) A2(-4.55,5.2) A3(-3.9,5.2) A4(-3.25,5.2) A5(-2.6,5.2) A6(-1.95,5.2) A7(-1.3,5.2) A8(-0.65,5.2) A9(0,5.2) A10(0.65,5.2) A11(1.3,5.2) A13(2.6,5.2) A14(3.25,5.2) A15(3.9,5.2) A16(4.55,5.2) A17(5.2,5.2) B1(-5.2,4.55) B2(-4.55,4.55) B3(-3.9,4.55) B4(-3.25,4.55) B5(-2.6,4.55) B7(-1.3,4.55) B8(-0.65,4.55) B9(0,4.55) B10(0.65,4.55) B11(1.3,4.55) B14(3.25,4.55) B15(3.9,4.55) B16(4.55,4.55) B17(5.2,4.55) C1(-5.2,3.9) C2(-4.55,3.9) C4(-3.25,3.9) C5(-2.6,3.9) C6(-1.95,3.9) C7(-1.3,3.9) C8(-0.65,3.9) C9(0,3.9) C10(0.65,3.9) C11(1.3,3.9) C12(1.95,3.9) C14(3.25,3.9) C15(3.9,3.9) C16(4.55,3.9) C17(5.2,3.9) D1(-5.2,3.25) D2(-4.55,3.25) D3(-3.9,3.25) D4(-3.25,3.25) D5(-2.6,3.25) D6(-1.95,3.25) D7(-1.3,3.25) D8(-0.65,3.25) D9(0,3.25) D10(0.65,3.25) D11(1.3,3.25) D12(1.95,3.25) D14(3.25,3.25) D15(3.9,3.25) D16(4.55,3.25) D17(5.2,3.25) E1(-5.2,2.6) E2(-4.55,2.6) E3(-3.9,2.6) E4(-3.25,2.6) E5(-2.6,2.6) E6(-1.95,2.6) E7(-1.3,2.6) E8(-0.65,2.6) E9(0,2.6) E10(0.65,2.6) E13(2.6,2.6) E14(3.25,2.6) E15(3.9,2.6) E16(4.55,2.6) E17(5.2,2.6) F2(-4.55,1.95) F6(-1.95,1.95) F7(-1.3,1.95) F8(-0.65,1.95) F9(0,1.95) F10(0.65,1.95) F11(1.3,1.95) F12(1.95,1.95) F13(2.6,1.95) F14(3.25,1.95) F15(3.9,1.95) F16(4.55,1.95) F17(5.2,1.95) G4(-3.25,1.3) G5(-2.6,1.3) G6(-1.95,1.3) G7(-1.3,1.3) G8(-0.65,1.3) G9(0,1.3) G10(0.65,1.3) G11(1.3,1.3) G12(1.95,1.3) G13(2.6,1.3) G14(3.25,1.3) G15(3.9,1.3) G16(4.55,1.3) G17(5.2,1.3) H1(-5.2,0.65) H2(-4.55,0.65) H3(-3.9,0.65) H4(-3.25,0.65) H5(-2.6,0.65) H6(-1.95,0.65) H7(-1.3,0.65) H8(-0.65,0.65) H9(0,0.65) H10(0.65,0.65) H11(1.3,0.65) H12(1.95,0.65) H14(3.25,0.65) H15(3.9,0.65) H16(4.55,0.65) H17(5.2,0.65) J1(-5.2,0) J2(-4.55,0) J3(-3.9,0) J4(-3.25,0) J5(-2.6,0) J6(-1.95,0) J7(-1.3,0) J8(-0.65,0) J9(0,0) J10(0.65,0) J11(1.3,0) J12(1.95,0) J14(3.25,0) J15(3.9,0) J16(4.55,0) J17(5.2,0) K1(-5.2,-0.65) K2(-4.55,-0.65) K3(-3.9,-0.65) K4(-3.25,-0.65) K5(-2.6,-0.65) K6(-1.95,-0.65) K7(-1.3,-0.65) K8(-0.65,-0.65) K9(0,-0.65) K10(0.65,-0.65) K11(1.3,-0.65) K12(1.95,-0.65) K13(2.6,-0.65) K14(3.25,-0.65) K15(3.9,-0.65) L1(-5.2,-1.3) L2(-4.55,-1.3) L3(-3.9,-1.3) L4(-3.25,-1.3) L5(-2.6,-1.3) L6(-1.95,-1.3) L7(-1.3,-1.3) L8(-0.65,-1.3) L9(0,-1.3) L10(0.65,-1.3) L11(1.3,-1.3) L12(1.95,-1.3) L13(2.6,-1.3) L14(3.25,-1.3) L15(3.9,-1.3) M1(-5.2,-1.95) M2(-4.55,-1.95) M3(-3.9,-1.95) M4(-3.25,-1.95) M5(-2.6,-1.95) M6(-1.95,-1.95) M7(-1.3,-1.95) M8(-0.65,-1.95) M9(0,-1.95) M10(0.65,-1.95) M11(1.3,-1.95) M12(1.95,-1.95) M13(2.6,-1.95) M14(3.25,-1.95) M15(3.9,-1.95) M16(4.55,-1.95) M17(5.2,-1.95) N1(-5.2,-2.6) N2(-4.55,-2.6) N3(-3.9,-2.6) N4(-3.25,-2.6) N5(-2.6,-2.6) N6(-1.95,-2.6) N9(0,-2.6) N10(0.65,-2.6) N11(1.3,-2.6) N12(1.95,-2.6) N13(2.6,-2.6) N14(3.25,-2.6) N15(3.9,-2.6) N16(4.55,-2.6) N17(5.2,-2.6) P1(-5.2,-3.25) P2(-4.55,-3.25) P3(-3.9,-3.25) P4(-3.25,-3.25) P5(-2.6,-3.25) P6(-1.95,-3.25) P7(-1.3,-3.25) P8(-0.65,-3.25) P9(0,-3.25) P10(0.65,-3.25) P11(1.3,-3.25) P12(1.95,-3.25) P13(2.6,-3.25) P14(3.25,-3.25) P15(3.9,-3.25) P16(4.55,-3.25) P17(5.2,-3.25) R1(-5.2,-3.9) R2(-4.55,-3.9) R3(-3.9,-3.9) R4(-3.25,-3.9) R5(-2.6,-3.9) R6(-1.95,-3.9) R7(-1.3,-3.9) R8(-0.65,-3.9) R9(0,-3.9) R10(0.65,-3.9) R11(1.3,-3.9) R12(1.95,-3.9) R13(2.6,-3.9) R14(3.25,-3.9) R15(3.9,-3.9) R16(4.55,-3.9) R17(5.2,-3.9) T1(-5.2,-4.55) T2(-4.55,-4.55) T3(-3.9,-4.55) T4(-3.25,-4.55) T5(-2.6,-4.55) T6(-1.95,-4.55) T7(-1.3,-4.55) T8(-0.65,-4.55) T9(0,-4.55) T10(0.65,-4.55) T11(1.3,-4.55) T12(1.95,-4.55) T13(2.6,-4.55) T14(3.25,-4.55) T15(3.9,-4.55) T16(4.55,-4.55) T17(5.2,-4.55) U1(-5.2,-5.2) U2(-4.55,-5.2) U3(-3.9,-5.2) U4(-3.25,-5.2) U5(-2.6,-5.2) U6(-1.95,-5.2) U7(-1.3,-5.2) U8(-0.65,-5.2) U9(0,-5.2) U10(0.65,-5.2) U11(1.3,-5.2) U12(1.95,-5.2) U13(2.6,-5.2) U14(3.25,-5.2) U15(3.9,-5.2) U16(4.55,-5.2) U17(5.2,-5.2)
TP30MIL
  rect 1.295x1.295 hole 0.787: 1(0,0)
TS16A127N0-5_7
  oval 1.702x0.762 smd: 1(-4.4,4.445) 2(-4.4,3.175) 3(-4.4,1.905) 4(-4.4,0.635) 5(-4.4,-0.635) 6(-4.4,-1.905) 7(-4.4,-3.175) 8(-4.4,-4.445) 9(4.4,-4.445) 10(4.4,-3.175) 11(4.4,-1.905) 12(4.4,-0.635) 13(4.4,0.635) 14(4.4,1.905) 15(4.4,3.175) 16(4.4,4.445)
TSON6_SMD_P0_65_UPG2179TB
  rect 0.4x0.825 smd: 1(-0.65,-0.938) 2(0,-0.938) 3(0.65,-0.938) 4(0.65,0.938) 5(0,0.938) 6(-0.65,0.938)
WBGA84_SMD_P0_8_W9751G6IB
  round 0.4 smd: A1(-5.6,-3.2) A2(-5.6,-2.4) A3(-5.6,-1.6) A7(-5.6,1.6) A8(-5.6,2.4) A9(-5.6,3.2) B1(-4.8,-3.2) B2(-4.8,-2.4) B3(-4.8,-1.6) B7(-4.8,1.6) B8(-4.8,2.4) B9(-4.8,3.2) C1(-4,-3.2) C2(-4,-2.4) C3(-4,-1.6) C7(-4,1.6) C8(-4,2.4) C9(-4,3.2) D1(-3.2,-3.2) D2(-3.2,-2.4) D3(-3.2,-1.6) D7(-3.2,1.6) D8(-3.2,2.4) D9(-3.2,3.2) E1(-2.4,-3.2) E2(-2.4,-2.4) E3(-2.4,-1.6) E7(-2.4,1.6) E8(-2.4,2.4) E9(-2.4,3.2) F1(-1.6,-3.2) F2(-1.6,-2.4) F3(-1.6,-1.6) F7(-1.6,1.6) F8(-1.6,2.4) F9(-1.6,3.2) G1(-0.8,-3.2) G2(-0.8,-2.4) G3(-0.8,-1.6) G7(-0.8,1.6) G8(-0.8,2.4) G9(-0.8,3.2) H1(0,-3.2) H2(0,-2.4) H3(0,-1.6) H7(0,1.6) H8(0,2.4) H9(0,3.2) J1(0.8,-3.2) J2(0.8,-2.4) J3(0.8,-1.6) J7(0.8,1.6) J8(0.8,2.4) J9(0.8,3.2) K2(1.6,-2.4) K3(1.6,-1.6) K7(1.6,1.6) K8(1.6,2.4) K9(1.6,3.2) L1(2.4,-3.2) L2(2.4,-2.4) L3(2.4,-1.6) L7(2.4,1.6) L8(2.4,2.4) M2(3.2,-2.4) M3(3.2,-1.6) M7(3.2,1.6) M8(3.2,2.4) M9(3.2,3.2) N1(4,-3.2) N2(4,-2.4) N3(4,-1.6) N7(4,1.6) N8(4,2.4) P2(4.8,-2.4) P3(4.8,-1.6) P7(4.8,1.6) P8(4.8,2.4) P9(4.8,3.2) R1(5.6,-3.2) R2(5.6,-2.4) R3(5.6,-1.6) R7(5.6,1.6) R8(5.6,2.4)
WSQFN76_SMD_P0_4_9X9_S
  rect 0.22x0.7 smd: 1(-3.6,-4.45) 2(-3.2,-4.45) 3(-2.8,-4.45) 4(-2.4,-4.45) 5(-2,-4.45) 6(-1.6,-4.45) 7(-1.2,-4.45) 8(-0.8,-4.45) 9(-0.4,-4.45) 10(0,-4.45) 11(0.4,-4.45) 12(0.8,-4.45) 13(1.2,-4.45) 14(1.6,-4.45) 15(2,-4.45) 16(2.4,-4.45) 17(2.8,-4.45) 18(3.2,-4.45) 19(3.6,-4.45) 39(3.6,4.45) 40(3.2,4.45) 41(2.8,4.45) 42(2.4,4.45) 43(2,4.45) 44(1.6,4.45) 45(1.2,4.45) 46(0.8,4.45) 47(0.4,4.45) 48(0,4.45) 49(-0.4,4.45) 50(-0.8,4.45) 51(-1.2,4.45) 52(-1.6,4.45) 53(-2,4.45) 54(-2.4,4.45) 55(-2.8,4.45) 56(-3.2,4.45) 57(-3.6,4.45)
  rect 0.7x0.22 smd: 20(4.45,-3.6) 21(4.45,-3.2) 22(4.45,-2.8) 23(4.45,-2.4) 24(4.45,-2) 25(4.45,-1.6) 26(4.45,-1.2) 27(4.45,-0.8) 28(4.45,-0.4) 29(4.45,0) 30(4.45,0.4) 31(4.45,0.8) 32(4.45,1.2) 33(4.45,1.6) 34(4.45,2) 35(4.45,2.4) 36(4.45,2.8) 37(4.45,3.2) 38(4.45,3.6) 58(-4.45,3.6) 59(-4.45,3.2) 60(-4.45,2.8) 61(-4.45,2.4) 62(-4.45,2) 63(-4.45,1.6) 64(-4.45,1.2) 65(-4.45,0.8) 66(-4.45,0.4) 67(-4.45,0) 68(-4.45,-0.4) 69(-4.45,-0.8) 70(-4.45,-1.2) 71(-4.45,-1.6) 72(-4.45,-2) 73(-4.45,-2.4) 74(-4.45,-2.8) 75(-4.45,-3.2) 76(-4.45,-3.6)
  rect 7.2x7.2 smd: 77(0,0)

## Nets
1.8VD: C73.1 C75.1 C76.1 C124.1 C128.1 C129.1 C130.1 C131.1 C132.1 C133.1 C134.1 C135.1 C136.1 C138.1 C139.1 C140.1 C820.1 C965.1 C966.1 R350.1 R812.1 R900.2 U1.H5(VDD25/DDR_IO_V18D_1) U1.J5(VDD25/DDR_IO_V18D_2) U1.K5(VDD25/DDR_IO_V18D_3) U1.N6(VDD25/DDR_IO_V18D_4) U1.P7(VDD25/DDR_IO_V18D_5) U22.A1(VDD1) U22.A9(VDDQ1) U22.C1(VDDQ2) U22.C3(VDDQ3) U22.C7(VDDQ4) U22.C9(VDDQ5) U22.E1(VDD2) U22.E9(VDDQ6) U22.G1(VDDQ7) U22.G3(VDDQ8) U22.G7(VDDQ9) U22.G9(VDDQ10) U22.J1(VDDL) U22.J9(VDD3) U22.M9(VDD4) U22.R1(VDD5)
3.3V: C925.1 C926.1 C952.1 L645.2 L648.2 R7.1
3.3VD: C39.1 C40.1 C41.1 C91.1 C92.2 C93.1 C109.2 C110.1 C137.1 C215.1 C456.1 C457.1 C928.1 C963.1 C964.1 C969.1 C1033.1 D47.2(CATHODE) J2.1 J13.14(VIO) J44.4(VDD) JP1.2 JP1.4 JP1.6 JP1.8 JP1.10 L13.1 L14.1 L644.2 L645.1 R27.1 R28.1 R29.1 R52.1 R53.1 R124.1 R125.1 R128.1 R129.1 R132.1 R133.1 R136.1 R137.1 R151.2 R154.1 R155.2 R156.2 R158.2 R163.2 R165.2 R166.2 R167.2 R170.2 R355.1 R370.2 R371.1 R372.2 R373.1 R374.2 R375.1 R376.1 R377.1 R388.1 R389.1 R471.1 R472.1 R473.1 R474.1 R475.1 R476.1 R896.1 R897.1 R912.2 R923.2 SR2.1 U1.A16(VFB_DDR) U1.B1(RF0_PA1_V33A) U1.D4(BG_V33A) U1.D9(SOC_IO_V33D_0) U1.E3(RF1_PA1_V33A) U1.E10(PCIE_V33A) U1.E13(UPHY0_V33A) U1.F13(GE_IO_V33D_2) U1.G5(SOC_IO_V33D_1) U1.G13(GE_IO_V33D_1) U1.M10(SOC_IO_V33D_2) U1.N10(SOC_IO_V33D_3) U9.8(VCC) U18.8(VCC) U626.3(VIN) U627.4(VCC) U632.5(VCC)
3.3VDDD: C20.1 C21.1 C24.1 C35.1 C1067.1 C1069.1 C1074.1 C1075.1 C1076.1 C1077.1 C1078.1 C1082.1 C1083.1 R3.1 R7.2 R11.2 R12.2 R14.1 R203.2 R205.2 U4.20(DVDD33_1) U4.34(AVDD33_1) U4.43(DVDD33_2) U4.56(AVDD33_2) U4.58(AVDD33_WF1_TX_A) U4.59(AVDD33_WF1_PA_A) U4.67(AVDD33_WF1_PA_G) U4.68(AVDD33_WF0_PA_A) U4.74(AVDD33_WF0_PA_G)
5V_USB: C967.1 C968.1 R895.2 USB1.1(V+)
12V: C917.1 C918.1 C1016.1 C1017.1 C1018.2 C1025.1 C1026.1 C1028.2 C1037.1 C1038.1 C1039.2 F1.1 R940.1 R942.1 R948.1 TVS1.2(CATHODE) U634.2(VIN) U635.2(VIN) U636.2(VIN)
12V_IN: F1.2 J45.1
AVDD15_CLDO_IN: C11.1 C12.1 C23.1 C25.1 C26.1 C28.1 C47.1 C1063.1 C1064.1 C1065.1 L3.2 R202.2 U4.6(AVDD15_WF0_SX) U4.10(AVDD15_WF0_LF) U4.37(AVDD15_CLDO) U4.55(AVDD15) U4.63(AVDD15_WF1_TRX) U4.72(AVDD15_WF0_TRX)
DVDD_1V2_IN: C59.1 C60.1 C61.1 C1087.1 R204.2 U4.19(DVDD12_1) U4.35(DVDD12_2) U4.36(CLDO) U4.42(DVDD12_3)
DVDD_PCIE_1V2_IN: C49.1 C1072.1 R204.1 U4.28(AVDD12_PCIE)
DVDD_PCIE_3V3_IN: C1066.1 C1068.1 C1070.1 R205.1 U4.21(AVDD33_PCIE_1) U4.25(AVDD33_PCIE_2)
GND: C2.2 C6.2 C7.2 C9.1 C10.1 C11.2 C12.2 C14.2 C15.2 C16.2 C17.2 C18.2 C19.2 C20.2 C21.2 C22.2 C23.2 C24.2 C25.2 C26.2 C28.2 C29.2 C30.2 C32.2 C33.2 C34.2 C35.2 C36.2 C39.2 C40.2 C41.2 C42.2 C43.2 C44.2 C45.1 C46.2 C47.2 C48.2 C49.2 C50.2 C51.2 C52.1 C54.2 C55.2 C56.2 C57.2 C58.2 C59.2 C60.2 C61.2 C69.1 C70.2 C72.2 C73.2 C75.2 C76.2 C82.1 C83.2 C87.2 C88.2 C90.2 C91.2 C92.1 C93.2 C94.2 C97.2 C99.2 C100.2 C103.2 C104.2 C105.2 C107.1 C108.2 C109.1 C110.2 C120.1 C122.1 C125.2 C128.2 C129.2 C130.2 C131.2 C132.2 C133.2 C134.2 C135.2 C136.2 C137.2 C138.2 C139.2 C140.2 C166.2 C167.2 C210.2 C215.2 C275.2 C456.2 C457.2 C821.2 C841.2 C842.2 C843.2 C844.2 C845.2 C846.2 C847.2 C917.2 C918.2 C925.2 C926.2 C928.2 C929.2 C952.2 C963.2 C964.2 C965.2 C966.2 C967.2 C968.2 C969.2 C971.2 C972.2 C974.2 C975.2 C976.2 C977.1 C978.1 C979.1 C982.1 C985.2 C986.2 C987.2 C988.2 C989.2 C990.2 C992.2 C994.2 C995.2 C996.2 C997.2 C999.1 C1000.2 C1001.1 C1004.1 C1005.1 C1007.2 C1008.2 C1009.2 C1011.2 C1012.2 C1013.2 C1014.2 C1016.2 C1017.2 C1018.1 C1019.1 C1020.2 C1021.2 C1022.2 C1025.2 C1026.2 C1027.1 C1028.1 C1029.1 C1030.2 C1031.2 C1032.2 C1033.2 C1035.1 C1037.2 C1038.2 C1039.1 C1040.1 C1041.2 C1042.2 C1043.2 C1045.2 C1046.1 C1048.2 C1049.2 C1051.2 C1052.2 C1056.1 C1057.1 C1058.1 C1061.1 C1062.1 C1063.2 C1064.2 C1065.2 C1066.2 C1067.2 C1068.2 C1069.2 C1070.2 C1071.1 C1072.2 C1073.1 C1074.2 C1075.2 C1076.2 C1077.2 C1078.2 C1081.1 C1082.2 C1083.2 C1085.2 C1086.2 C1087.2 CA2.2 CA3.2 CA5.2 CA6.2 CA12.2 CA16.2 CA20.2 CA21.2 CON1.2 CON1.3(GNDA) CON2.2 CON2.3(GNDA) CON3.2 CON3.3(GNDA) CON4.2 CON4.3(GNDA) D3.1 D4.1 J2.4 J13.2(GND1) J13.4(GND2) J13.6(GND3) J13.8(GND4) J13.10(GND5) J44.3(VSS1) J44.6(VSS2) J44.GND1 J44.GND2 J45.2 J45.3 JP1.1 JP1.3 JP1.5 JP1.7 JP1.9 JP2.5 JP2.7 JP2.9 L1.1 L2.1 L6.2 L9.2 LA3.1 LA4.1 LA5.1 LA6.1 Q1.2(E1) Q1.4(E2) Q2.2(E1) Q2.4(E2) R5.1 R6.1 R24.2 R42.1 R51.2 R54.2 R107.2 R126.1 R127.1 R130.1 R131.1 R134.1 R135.1 R139.1 R142.1 R159.1 R351.2 R381.2 R477.1 R813.2 R825.2 R898.2 R943.2 R945.2 R946.2 R947.2 R950.2 R951.2 R959.1 R960.1 R961.1 RC1.2 S2.2 S2.3 S2.4 S3.1 S3.3 S3.4 TVS1.1(ANODE) U1.C2(GND2) U1.C4(GND1) U1.D2(GND3) U1.F2(GND18) U1.F6(GND3) U1.F7(GND4) U1.F8(GND5) U1.F9(GND6) U1.F10(GND7) U1.F11(GND8) U1.F12(GND9) U1.G6(GND10) U1.G7(GND11) U1.G8(GND12) U1.G9(GND13) U1.G10(GND14) U1.G11(GND15) U1.G12(GND16) U1.H6(GND42) U1.H7(GND43) U1.H8(GND45) U1.H9(GND46) U1.H10(GND47) U1.H11(GND48) U1.H12(GND49) U1.J6(GND25) U1.J7(GND26) U1.J8(GND27) U1.J9(GND28) U1.J10(GND29) U1.J11(GND30) U1.J12(GND31) U1.K4(GND17) U1.K6(GND32) U1.K7(GND33) U1.K8(GND34) U1.K9(GND35) U1.K10(GND36) U1.K11(GND37) U1.K12(GND38) U1.L6(GND19) U1.L7(GND20) U1.L8(GND21) U1.L9(GND22) U1.L10(GND23) U1.L11(GND24) U1.L12(GND_EPHY_234) U1.M6(GND39) U1.M7(GND40) U1.M8(GND41) U1.M11(GND_EPHY_01) U1.M12(GND_EPHY_COM) U1.N11(GND) U2.1(GND1) U2.3(GND2) U2.7(GND3) U2.12(GND4) U2.14(GND5) U2.17(GND6) U3.1(G1) U3.3(G2) U4.14(TEST_MODE) U4.31(AVSS12_PCIE) U4.38(AVSS33_MISC) U4.39(AVSS33_SMPS) U4.77(EPAD) U5.2(NC1) U5.3(X2) U5.4(NC2) U6.5(S1) U9.1(A0) U9.2(A1) U9.3(A2) U9.4(GND) U9.7(WP) U11.2(NC1) U11.4(NC2) U18.4(GND) U22.A3(VSS1) U22.A7(VSSQ1) U22.B2(VSSQ2) U22.B8(VSSQ3) U22.D2(VSSQ4) U22.D8(VSSQ5) U22.E3(VSS2) U22.E7(VSSQ6) U22.F2(VSSQ7) U22.F8(VSSQ8) U22.H2(VSSQ9) U22.H8(VSSQ10) U22.J3(VSS3) U22.J7(VSSDL) U22.N1(VSS4) U22.P9(VSS5) U627.1(GND) U628.2(G1) U628.4(G2) U628.6(G3) U629.2(G1) U629.4(G2) U629.6(G3) U630.2(GND) U631.2(GND) U632.3(GND) U634.4(GND) U634.9(EX-PAD) U635.4(GND) U635.9(EX-PAD) U636.4(GND) U636.9(EX-PAD) U637.1(GND1) U637.3(GND2) U637.7(GND3) U637.12(GND4) U637.14(GND5) U637.17(GND6) U638.1(G1) U638.3(G2) UC1.2 UC2.2 USB1.4(G) USB1.5(CG1) USB1.6(CG2)
V12: C48.1 R829.2
AA: C31.2 R22.1
ANT_TRN_1517: C990.1 C1007.1 R128.2 R130.2 R952.2 U630.6(VC2) U631.6(VC2)
ANT_TRNB_477: C992.1 C1008.1 R129.2 R131.2 R953.2 R954.1 U630.4(VC1) U631.4(VC1)
ANTENNA_0: C974.1 CON4.1 L637.1
ANTENNA_1: C971.1 CON3.1 L636.1
APCK_RFCKO_N_16620654: R15.1 R382.2
APCK_RFCKO_P_16620834: R18.1 R383.2
APCK_RFCKON: R382.1 U1.B11(APCK_RFCKON)
APCK_RFCKOP: R383.1 U1.A11(APCK_RFCKOP)
BBPLL_V12A: C36.1 R23.2 U1.A7(BBPLL_V12A)
BG_RES_12K: C83.1 R107.1 U1.A4(BG_EXTR)
CHGND: C120.2 C122.2 C199.2 C1056.2 C1057.2 C1058.2
CLK_A_IN_917: C1061.2 R36.1
CLK_N_3013: C127.2 R100.2 R150.2 U22.K8(CK_N)
CLK_P_3113: C127.1 R99.2 R150.1 U22.J8(CK_P)
CPURST_N_16619321: C1086.1 R12.1 R13.2 R899.2 U1.C6(PORST_N)
CT0: C1014.1 T3.8(CTVD2)
CT1: C1013.1 T3.3(CTVD1)
